# Altium PCB MK76_HOST__B.pcbdoc (part 1 of 2)
Units mil, origin at the board's own origin, x right, y up, seen from the top; angles counter-clockwise.
Board outline 6000 x 6000 mil, 4 copper layers (Top Layer, GND-SIG1, GND-SIG2, Bottom Layer), stack 61.156 mil thick; 71 components, 104 nets, 530 pads, 76 vias.
Unrouted connection lines stored in the file: 214.
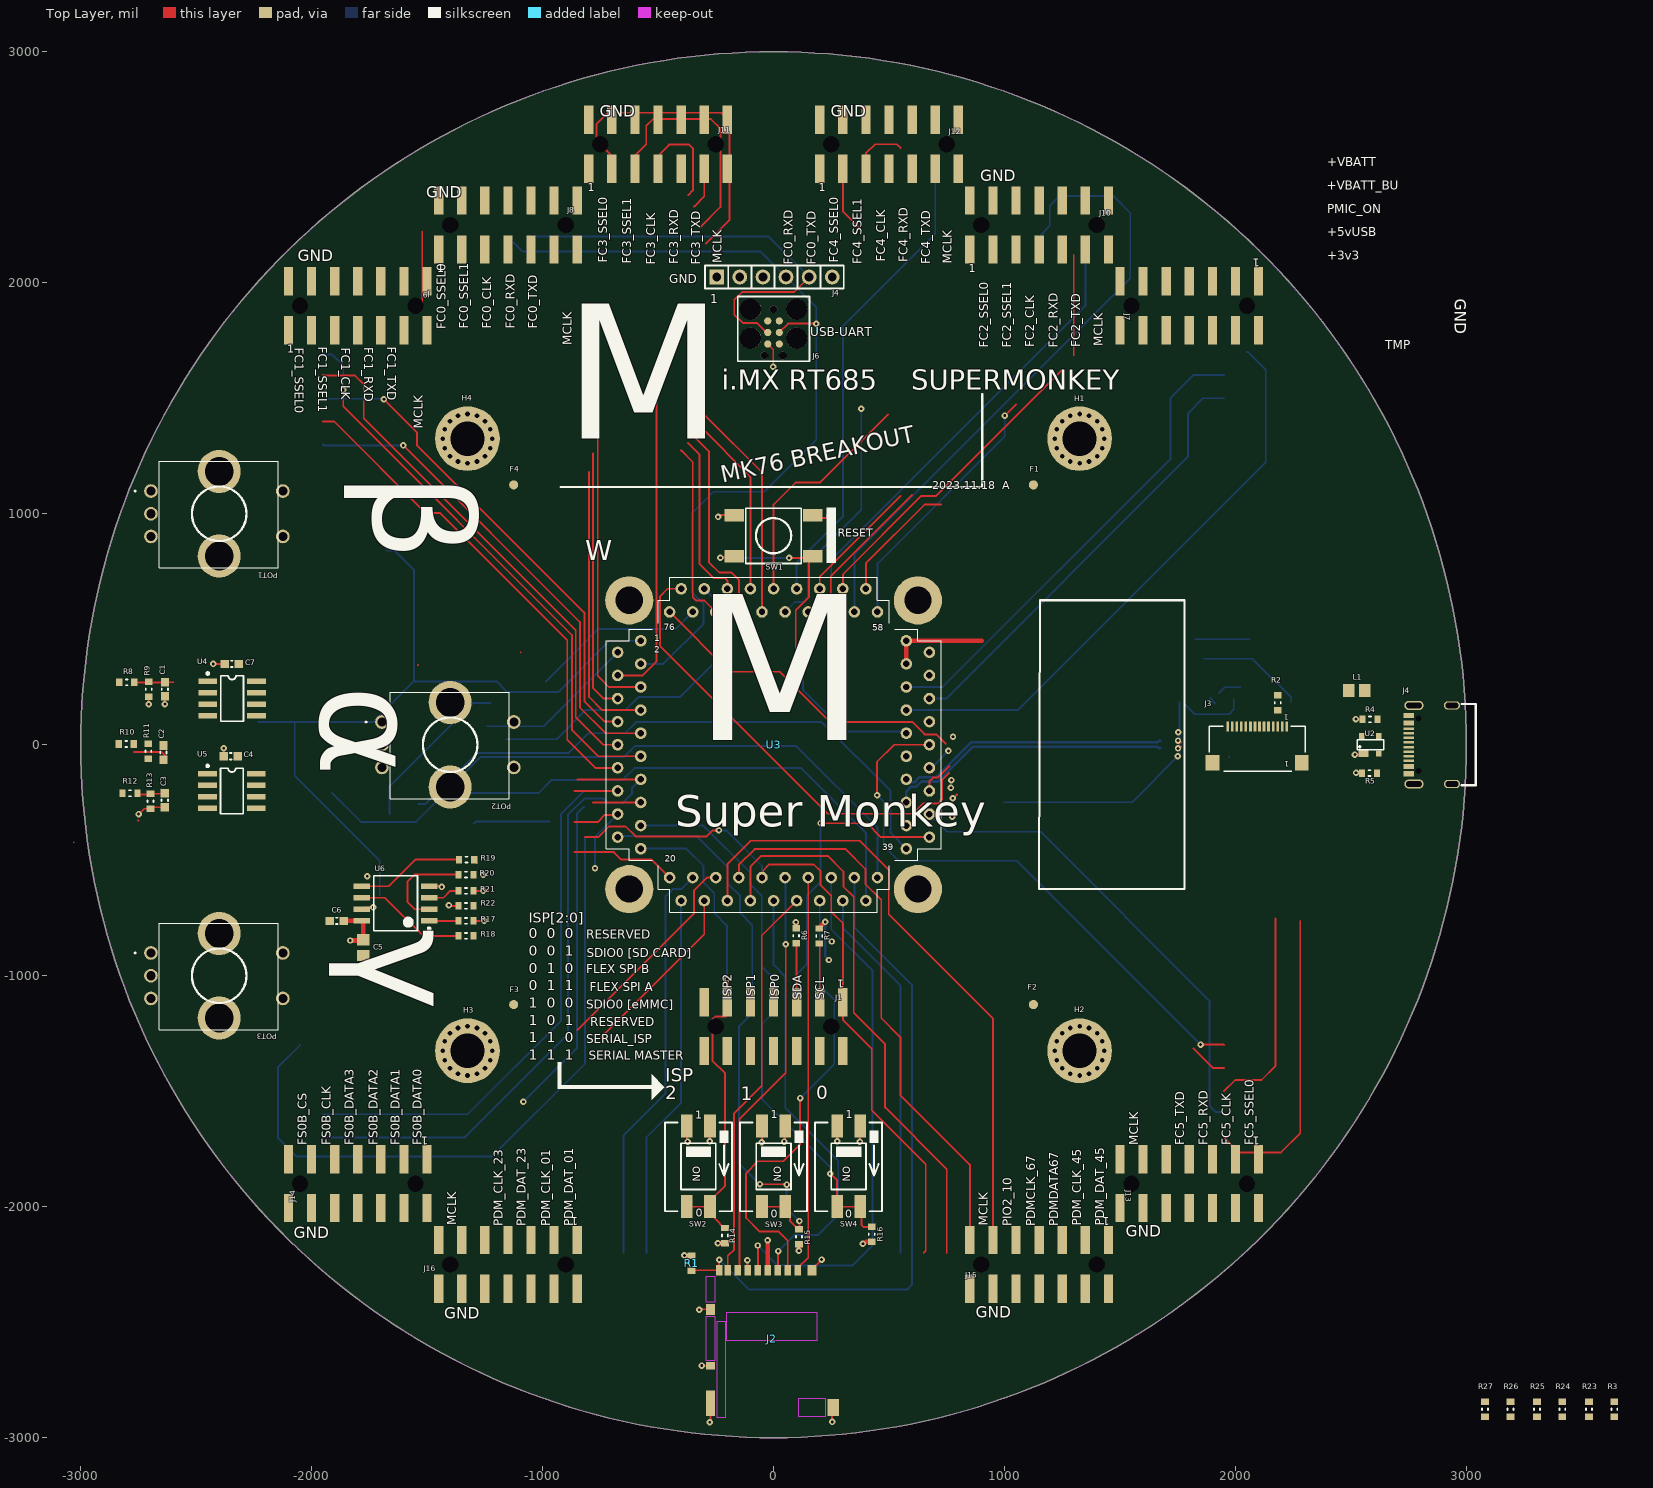
[diagram p0: Top Layer view]
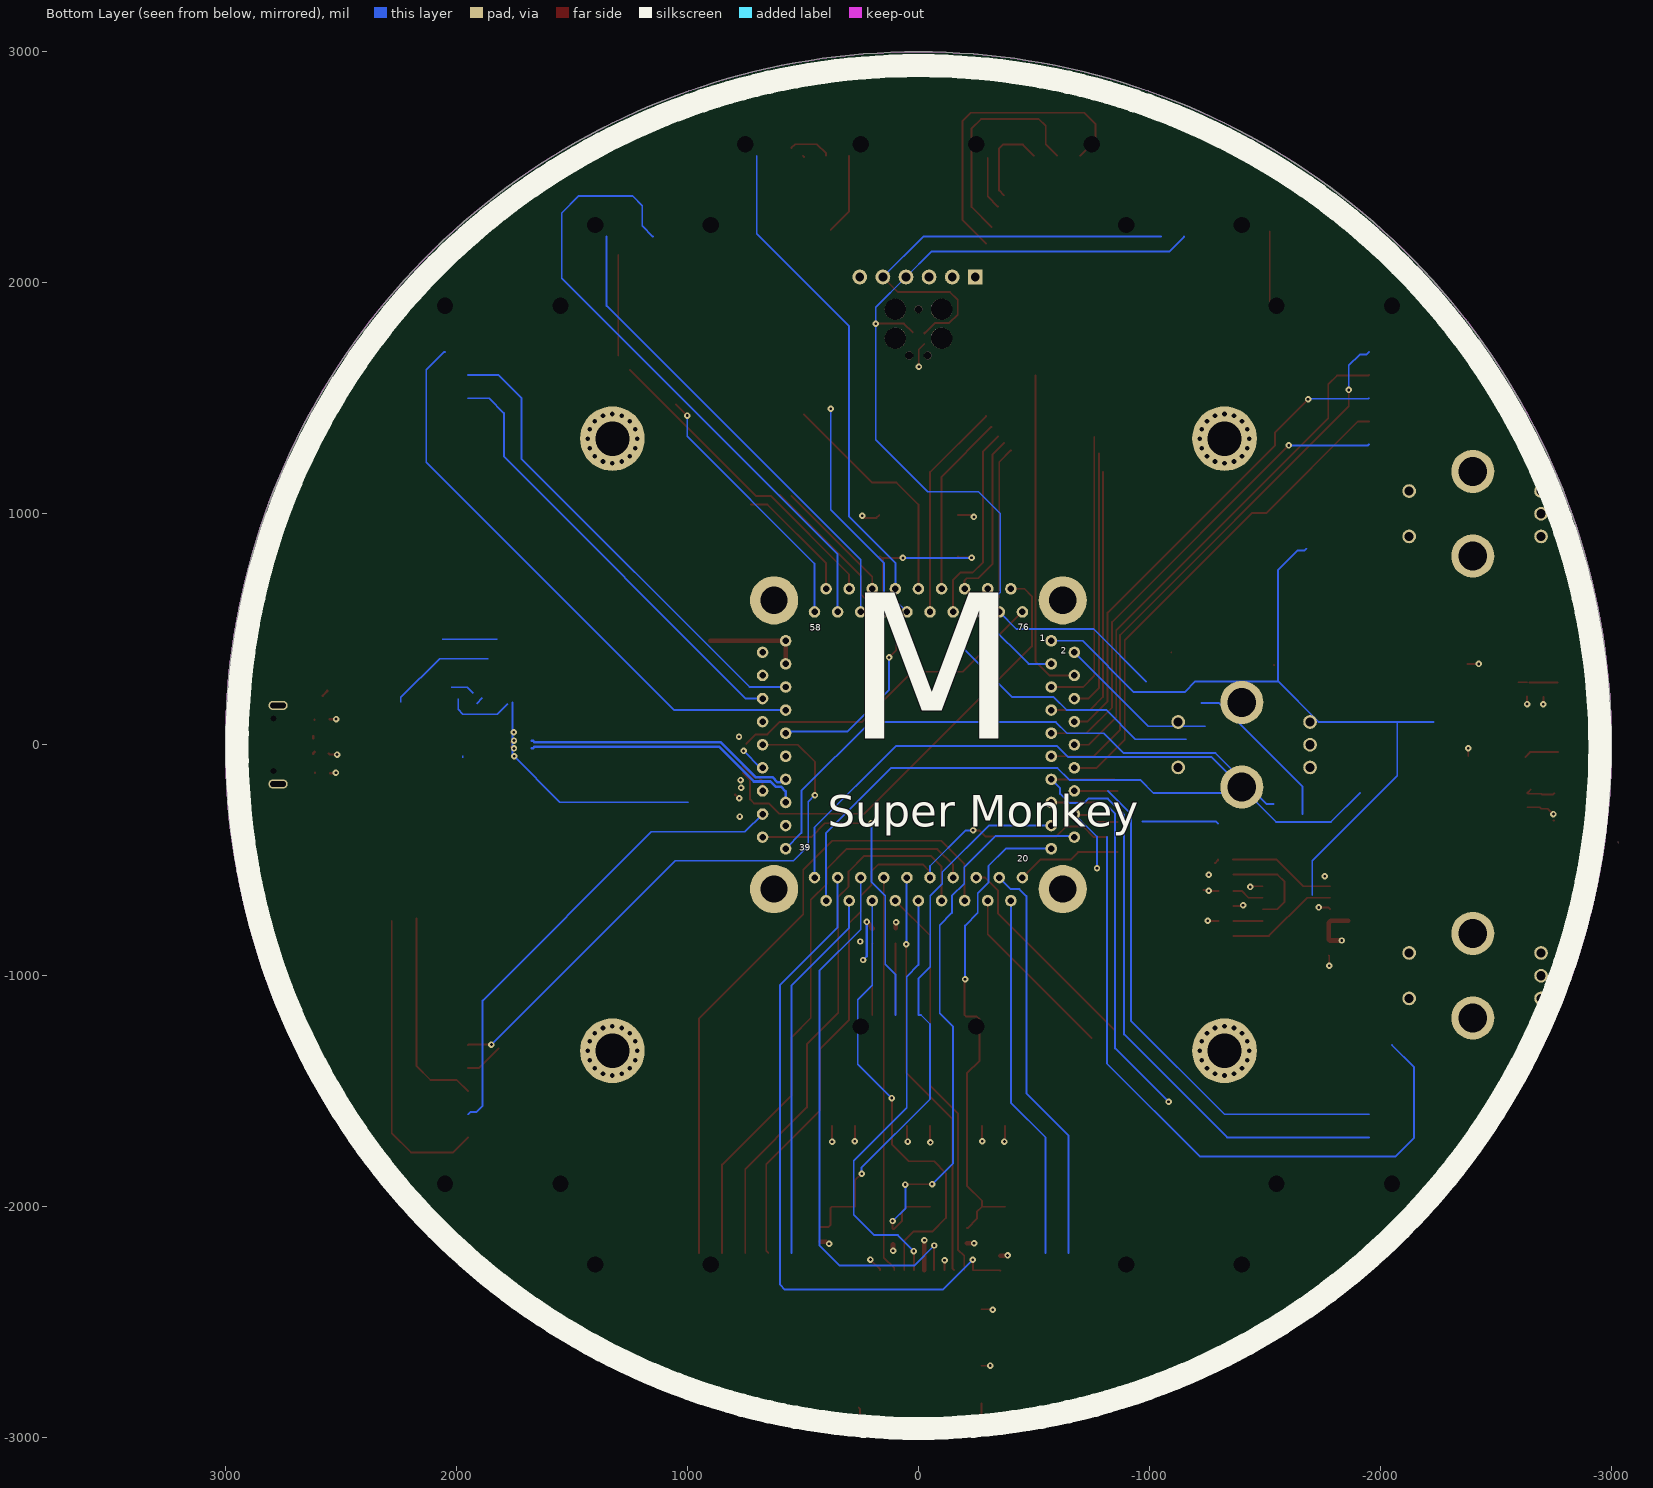
[diagram p1: Bottom Layer view, seen from below]
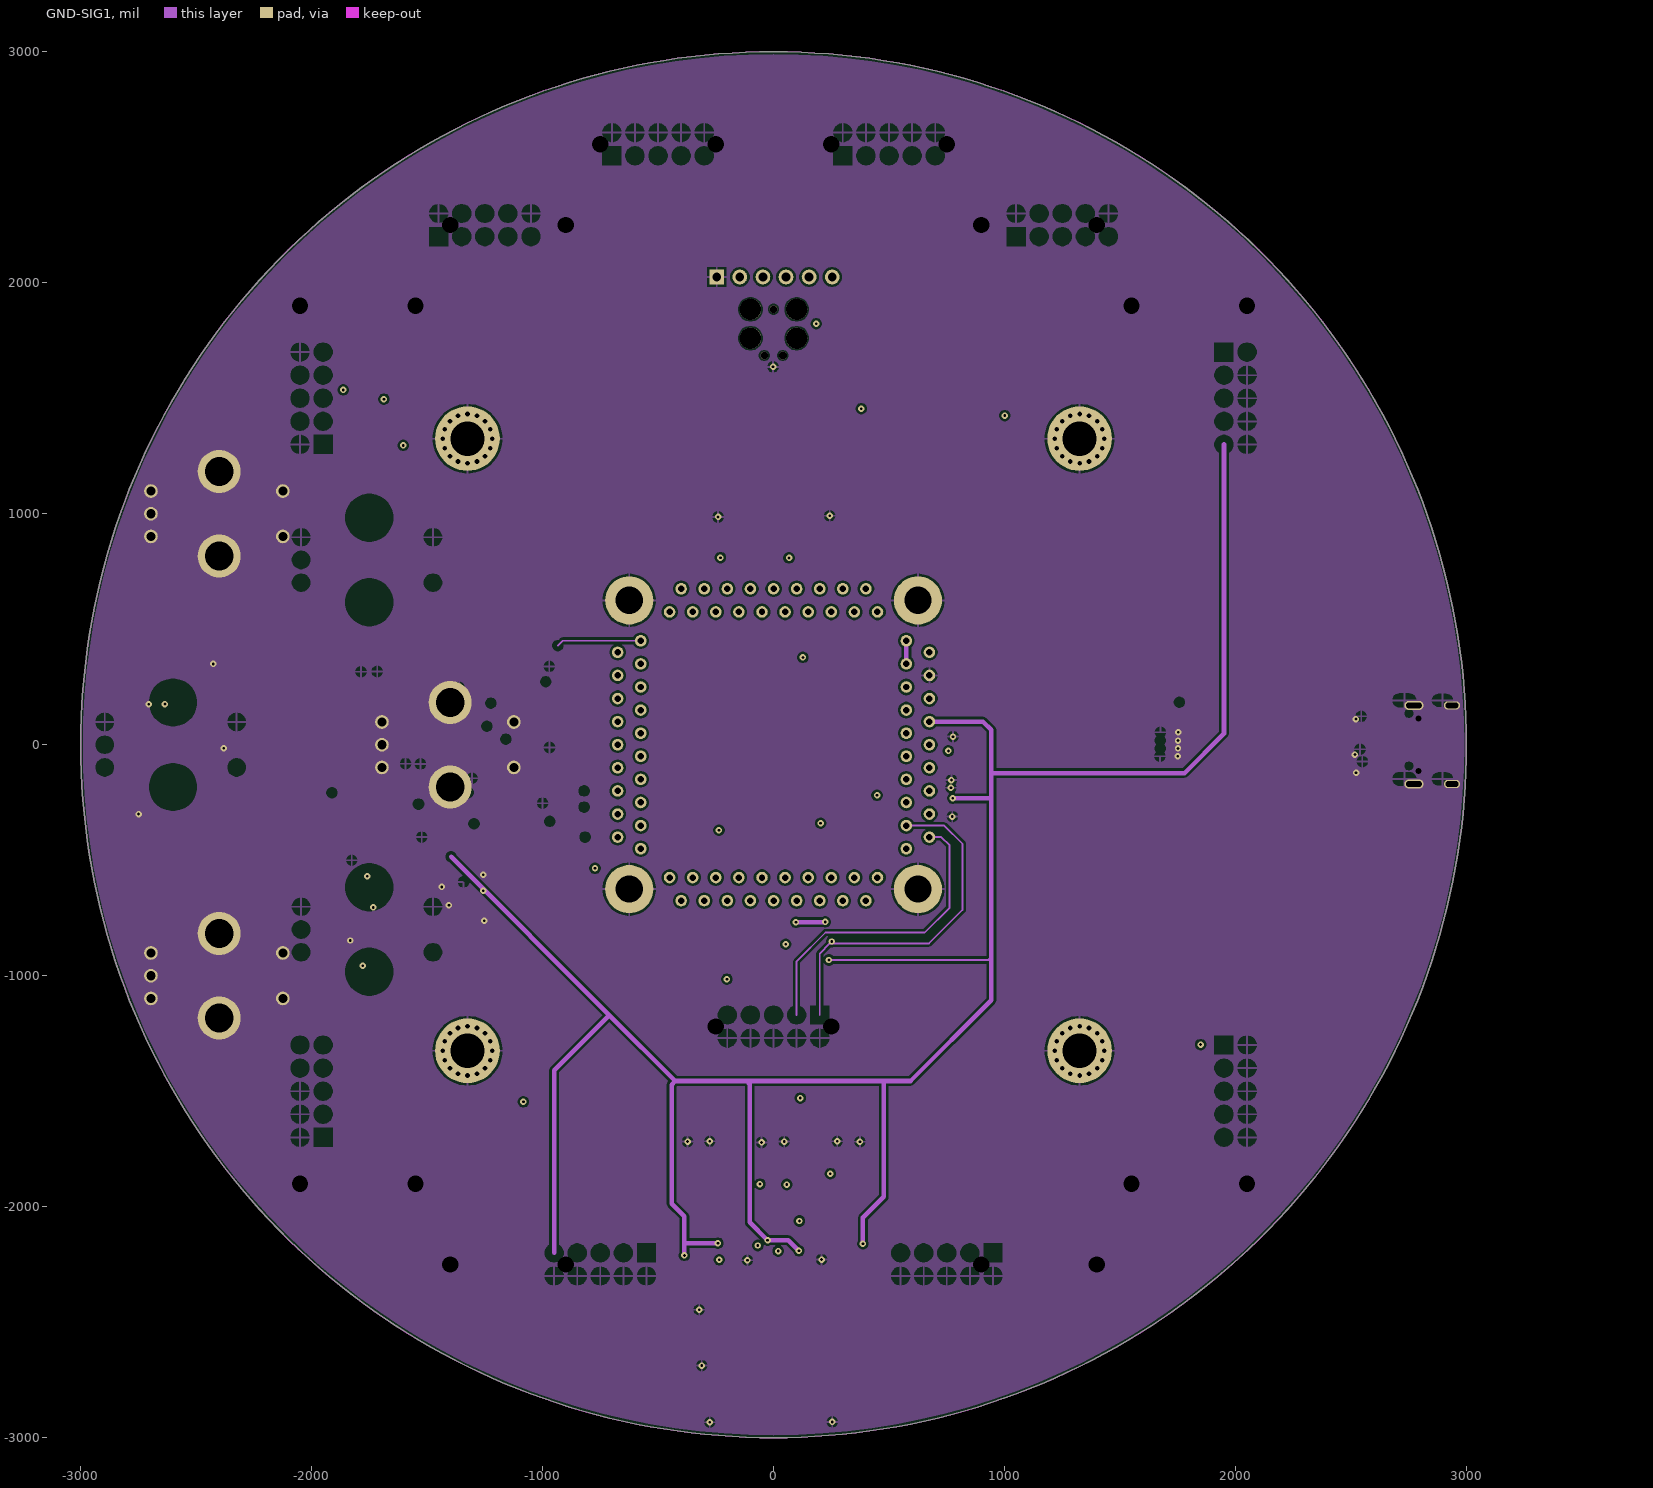
[diagram p2: GND-SIG1]
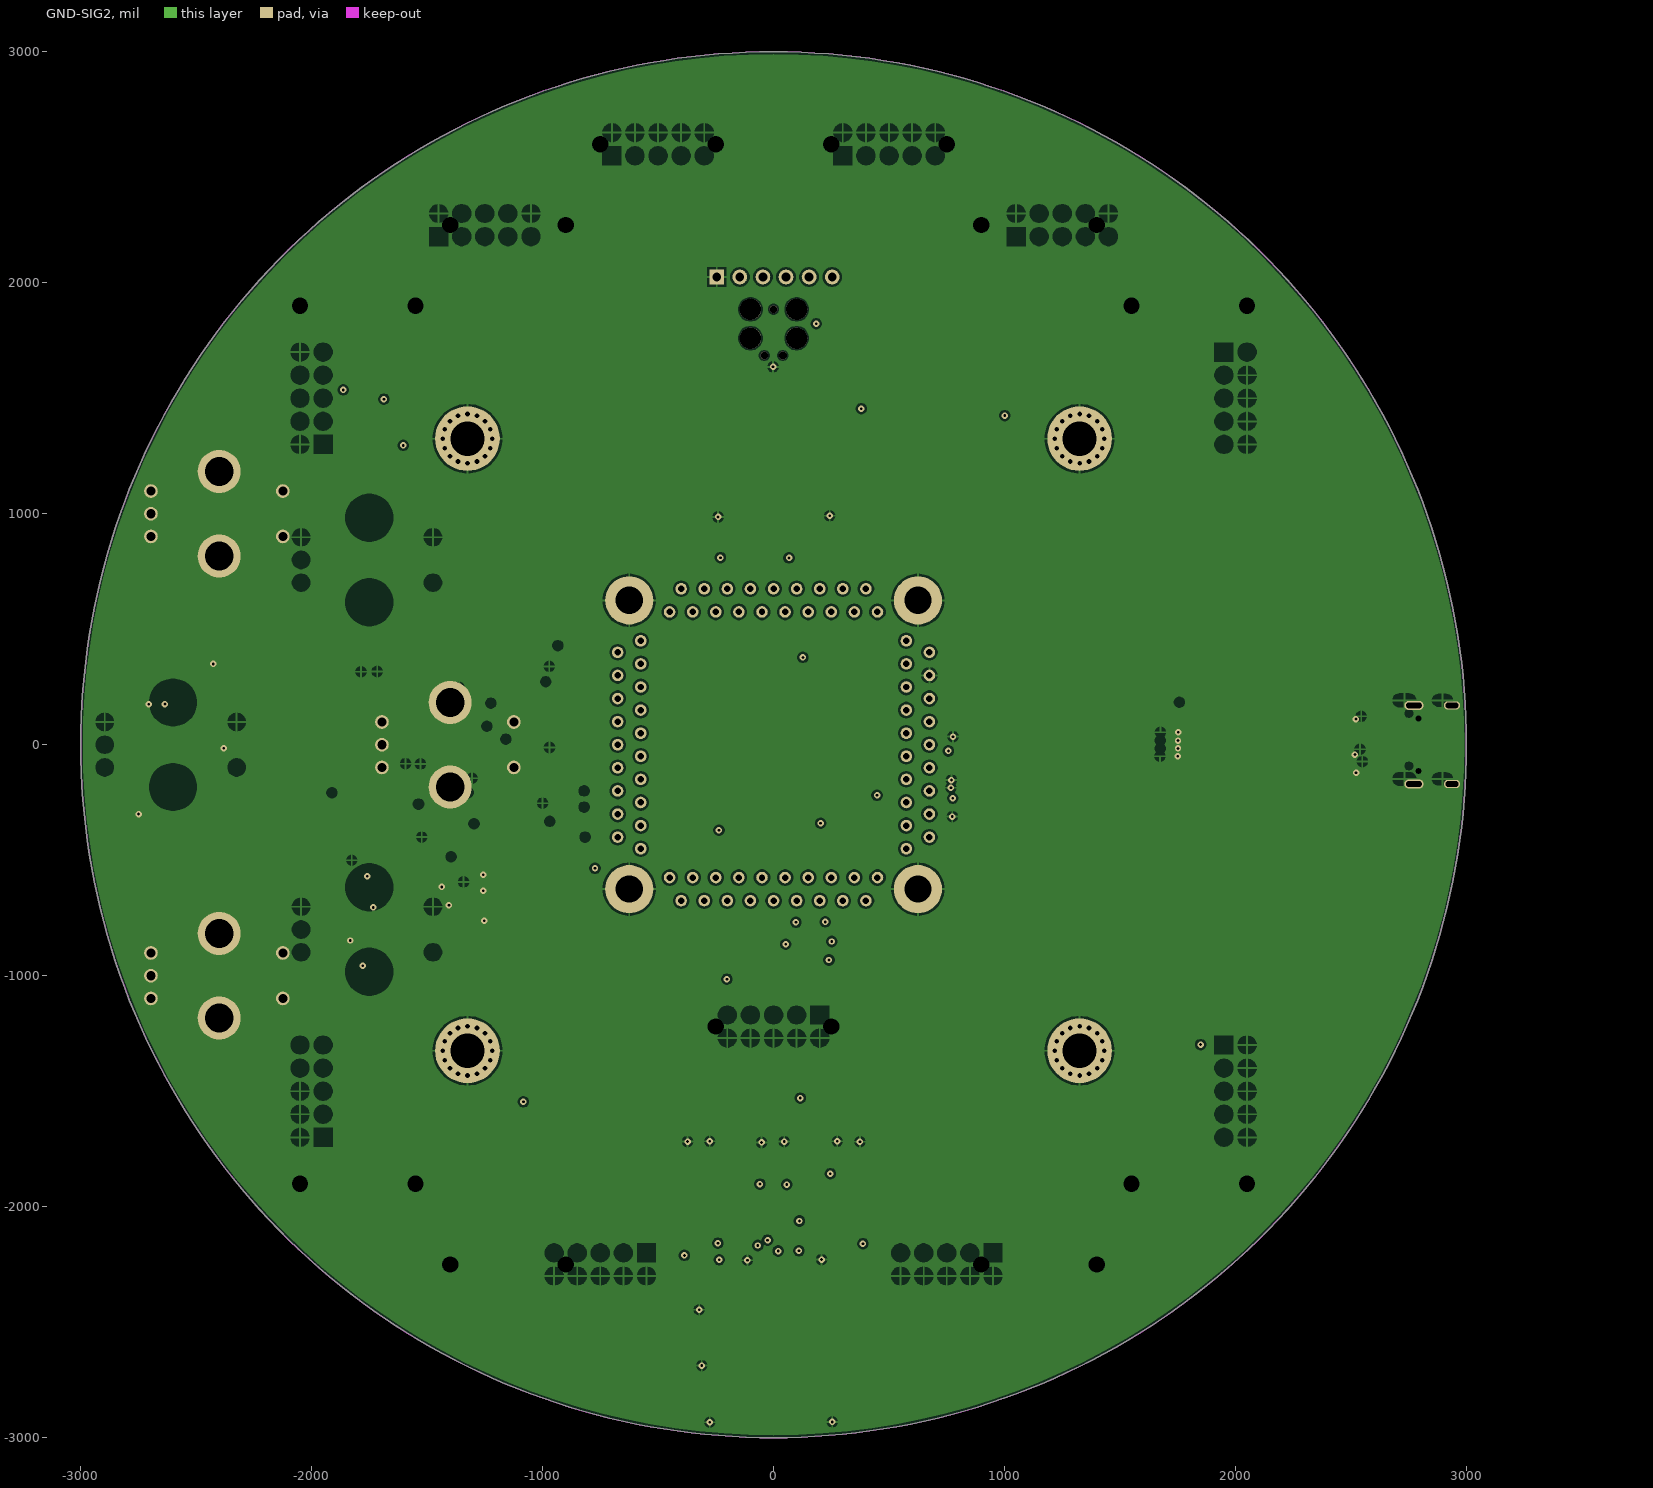
[diagram p3: GND-SIG2]

## Layer stack, top to bottom
Top Solder: solder mask 0.4, Solder Resist, Dk 3.5
Top Layer: signal copper 1.4
Dielectric 2: prepreg 2.8, PP-006, Dk 4.1
GND-SIG1: signal copper 1.378
Dielectric 1: dielectric 50, FR-4, Dk 4.8
GND-SIG2: signal copper 1.378
Dielectric 3: prepreg 2.8, PP-006, Dk 4.1
Bottom Layer: signal copper 1.4
Bottom Solder: solder mask 0.4, Solder Resist, Dk 3.5

## Board outline
-3000,0 ccw(c0,0) 0,-3000 ccw(c0,0) 3000,0 ccw(c0,0) 0,3000 ccw(c0,0)

## Design rules (kind name [scope] priority, off if disabled: settings)
Clearance [All] p1: gap=6 ignorepadtopadclearanceinfootprint=FALSE except(10: Arc-Poly Track-Poly SMDPad-Poly THPad-Poly Via-Poly Fill-Poly Poly-Poly)
DiffPairsRouting [All] p1: maxlimit=10 minlimit=8 mostfreqgap=8 toplayer_minwidth=8 toplayer_maxwidth=11.26 toplayer_prefwidth=11.26 midlayer1_minwidth=8 midlayer1_maxwidth=11.26 midlayer1_prefwidth=11.26 midlayer2_minwidth=8 midlayer2_maxwidth=11.26 midlayer2_prefwidth=11.26 bottomlayer_minwidth=8 bottomlayer_maxwidth=11.26 bottomlayer_prefwidth=11.26 maxuncoupledlength=500
Height [All] p1: minheight=0 maxheight=2000 prefheight=500
HoleSize [All] p1: absolutevalues=TRUE maxlimit=500 minlimit=1 maxpercent=80.000 minpercent=20.000
PolygonConnect [All] p1: connectstyle=Relief reliefconductorwidth=10 reliefentries=4 polygonreliefangle="90 Angle" airgapwidth=10
RoutingVias [All] p1: holewidth=12 width=28 viastyle="Through Hole" minholewidth=12 minwidth=28 maxholewidth=12 maxwidth=28
SolderMaskExpansion [All] p1: expansion=4 istentingtop=FALSE
SupplyNets "Schematic Supply Nets_7" [InNet('+5v0')] p1: voltage=0.000
SupplyNets "Schematic Supply Nets_6" [InNet('GND')] p2: voltage=0.000
SupplyNets "Schematic Supply Nets_5" [InNet('+3v3')] p3: voltage=0.000
SupplyNets "Schematic Supply Nets_4" [InNet('+5vUSB')] p4: voltage=0.000
SupplyNets "Schematic Supply Nets_3" [InNet('+ADC_VREF')] p5: voltage=0.000
SupplyNets "Schematic Supply Nets_2" [InNet('+VBATT_BU')] p6: voltage=0.000
SupplyNets "Schematic Supply Nets_1" [InNet('+VUSB_RAW')] p7: voltage=0.000
SupplyNets "Schematic Supply Nets" [InNet('+VBATT')] p8: voltage=0.000
Width [All] p1: maxlimit=30 minlimit=6 preferedwidth=6
27 further rules are at their usual default settings.

## Classes and differential pairs
differential pair USB: +USB_P -USB_N

## Components (designator, comment, footprint, x,y, rotation, side; value= is the part's Value field where it differs from the comment)
C1 "0.1µF" C0603_0.90MM_MD -2635,240 r90 top
C2 "0.1µF" C0603_0.90MM_MD -2641.76,-33.76 r90 top
C3 "0.1µF" C0603_0.90MM_MD -2636,-240 r90 top
C4 "0.1µF" C0603_0.90MM_MD -2350,-50 r0 top
C5 "4.7µF" C0805_1.45MM_MD -1776.49,-878.07 r90 top
C6 "0.1µF" C0603_0.90MM_MD -1890.97,-762.51 r0 top
C7 "0.1µF" C0603_0.90MM_MD -2345.51,350 r0 top
F1 "PCB Fiducial" "Fiducial 1mm - 2mm" 1125,1125 r180 top
F2 "PCB Fiducial" "Fiducial 1mm - 2mm" 1125,-1125 r180 top
F3 "PCB Fiducial" "Fiducial 1mm - 2mm" -1125,-1125 r180 top
F4 "PCB Fiducial" "Fiducial 1mm - 2mm" -1125,1125 r180 top
H1 "6-32 Hole" "6-32 X 0" 1325,1325 r180 top value=6-32
H2 "6-32 Hole" "6-32 X 0" 1325,-1325 r180 top value=6-32
H3 "6-32 Hole" "6-32 X 0" -1325,-1325 r180 top value=6-32
H4 "6-32 Hole" "6-32 X 0" -1325,1325 r180 top value=6-32
J1 "PZ254-2-07-S" PZ254-2-07-S 0,-1220 r180 top
J2 "DM3AT-SF-PEJM5" DM3AT-SF-PEJM5 -21.06,-2906.89 r0 top
J3 "XF2M-1415-1A" XF2M-1415-1A 2094,0 r180 top
J4 "12402012E212A" 12402012E212A 3039.57,0 r90 top
J4 "TSM-106-01-T-SV" 0901200126 4,2025 r0 top
J6 "TC2030‐CTL‐NL" TC2030 -160,1945 r270 top
J7 "PZ254-2-07-S" PZ254-2-07-S 1800,1900 r180 top
J8 "PZ254-2-07-S" PZ254-2-07-S -1150,2250 r0 top
J9 "PZ254-2-07-S" PZ254-2-07-S -1800,1900 r0 top
J10 "PZ254-2-07-S" PZ254-2-07-S 1150,2250 r0 top
J11 "PZ254-2-07-S" PZ254-2-07-S -500,2600 r0 top
J12 "PZ254-2-07-S" PZ254-2-07-S 500,2600 r0 top
J13 "PZ254-2-07-S" PZ254-2-07-S 1800,-1900 r180 top
J14 "PZ254-2-07-S" PZ254-2-07-S -1800,-1900 r180 top
J15 "PZ254-2-07-S" PZ254-2-07-S 1150,-2250 r180 top
J16 "PZ254-2-07-S" PZ254-2-07-S -1150,-2250 r180 top
L1 "CBC2012T4R7M" C0805_1.45MM_MD 2525,235 r180 top
POT1 "PRS11R-425F-S103B1" PRS11R425FS103B1 -2400,1000 r270 top
POT2 "PRS11R-425F-S103B1" PRS11R425FS103B1 -1400,0 r270 top
POT3 "PRS11R-425F-S103B1" PRS11R425FS103B1 -2400,-1000 r270 top
R1 "100k" R0603_0.55MM_MD -355,-2245 r90 top
R2 "33Ω" R0603_0.55MM_MD 2183,181 r270 top
R3 "100Ω" R0603_0.55MM_MD 3640.15,-2877.18 r90 top
R4 "5.1k" R0603_0.55MM_MD 2582.52,110 r0 top
R5 "5.1k" R0603_0.55MM_MD 2580,-123 r0 top
R6 "2.2k" R0603_0.55MM_MD 98,-827.52 r270 top
R7 "2.2k" R0603_0.55MM_MD 198,-828 r270 top
R8 "0" R0603_0.55MM_MD -2800,270 r0 top
R9 "100k" R0603_0.55MM_MD -2705,240 r90 top
R10 "0" R0603_0.55MM_MD -2801.76,3.24 r0 top
R11 "100k" R0603_0.55MM_MD -2706.76,-28.76 r90 top
R12 "0" R0603_0.55MM_MD -2786,-210 r0 top
R13 "100k" R0603_0.55MM_MD -2697,-245 r90 top
R14 "1k" R0603_0.55MM_MD -210,-2125 r270 top
R15 "1k" R0603_0.55MM_MD 110,-2130 r270 top
R16 "1k" R0603_0.55MM_MD 425,-2120 r270 top
R17 "0" R0603_0.55MM_MD -1331.49,-762.51 r180 top
R18 "0" R0603_0.55MM_MD -1331.49,-827.51 r180 top
R19 "0" R0603_0.55MM_MD -1329,-497.51 r180 top
R20 "0" R0603_0.55MM_MD -1331.49,-562.51 r180 top
R21 "0" R0603_0.55MM_MD -1331.49,-632.51 r180 top
R22 "0" R0603_0.55MM_MD -1331.49,-697.51 r180 top
R23 "100Ω" R0603_0.55MM_MD 3530.15,-2877.18 r90 top
R24 "100Ω" R0603_0.55MM_MD 3415.15,-2877.18 r90 top
R25 "100Ω" R0603_0.55MM_MD 3305.15,-2877.18 r90 top
R26 "100Ω" R0603_0.55MM_MD 3190.15,-2877.18 r90 top
R27 "100Ω" R0603_0.55MM_MD 3080.15,-2877.18 r90 top
SW1 "FSM4JSMATR" FSM4JSMA 0,905 r270 top
SW2 "SWITCH DIP DPST 1POS SMT" "CTS 1-POS DPST" -325,-1825 r180 top value=204-211ST
SW3 "SWITCH DIP DPST 1POS SMT" "CTS 1-POS DPST" 0,-1825 r180 top value=204-211ST
SW4 "SWITCH DIP DPST 1POS SMT" "CTS 1-POS DPST" 325,-1825 r180 top value=204-211ST
U2 "PRTR5V0U2X,215" SOT143B 2554,-37.8 r0 top
U3 "=Value" RT_SUPER_C 0,0 r0 top locked
U4 "MCP6002-I/SN" "SOIC 8" -2344,200 r270 top
U5 "MCP6002-I/SN" "SOIC 8" -2345,-200 r270 top
U6 "W25Q64JVSIM" SOIC127P830X200-8L -1636.49,-687.51 r180 top

## Footprints (in the part's own frame and the unit in brackets; to place one, negate y for a bottom-side part, rotate by r counter-clockwise, add the part's x,y. Pads: shape width x height; smd on the part's side, far side on the other; paste and mask are expansions set on the pad)
"6-32 X 0" [mil] "6-32 X 0 Length Philip Pan Head Machine Screw"
  round 30 hole 20: 1(-107,0) 1(-98.86,-40.95) 1(-98.86,40.95) 1(-75.66,75.66) 1(-75.66,-75.66) 1(-40.95,98.86) 1(-40.95,-98.86) 1(0,107) 1(0,-107) 1(40.95,98.86) 1(40.95,-98.86) 1(75.66,75.66) 1(75.66,-75.66) 1(98.86,-40.95) 1(98.86,40.95) 1(107,0)
  round 280 hole 148: 1(0,0)
12402012E212A [mm] "USB-C  2.0"
  round 0 hole 0.65: 71(2.89,6.28) ALIGN1(-2.89,6.28)
  rect 0.575x1.15 smd: A1B12(-3.2,7.355) A4B9(-2.4,7.355) B1A12(3.2,7.355) B4A9(2.4,7.355)
  rect 0.275x1.15 smd: A5(-1.25,7.355) A6(-0.25,7.355) A7(0.25,7.355) A8(1.25,7.355) B5(1.75,7.355) B6(0.75,7.355) B7(-0.75,7.355) B8(-1.75,7.355)
  oval 1x2.1 hole 0.6 slot 1.7 at 90 deg: M1(-4.32,6.78) M2(4.32,6.78)
  oval 0.9x1.8 hole 0.6 slot 1.4 at 90 deg: M3(-4.32,2.6) M4(4.32,2.6)
  silkscreen extent -4.47,-0.03 4.47,1.52, body extent -4.47,-0.02 4.47,7.58, height 3.27
0901200126 [mil] "CONN HEADER 6POS .100\" STR TIN"
  rect 64x64 hole 38: 1(-250,0)
  round 64 hole 38: 2(-150,0) 3(-50,0) 4(50,0) 5(150,0) 6(250,0)
  silkscreen extent -300,-50 300,50, body extent -305,-50 300,50, height 330
C0603_0.90MM_MD [mm] "Capacitor 0603 - Medium Density"
  rect 0.95x0.9 smd: 1(-0.775,0) 2(0.775,0)
  silkscreen extent -0.1,-0.35 0.1,0.35, body extent -0.8,-0.4 0.8,0.4, height 0.9
C0805_1.45MM_MD [mm] "Capacitor - 0805 - Medium Density"
  rect 1.25x1.4 smd: 1(-0.875,0) 2(0.875,0)
  body extent -1,-0.62 1,0.63, height 1.45
"CTS 1-POS DPST" [mil] "CTS 1-POS DPST"
  rect 50x100 smd: 1(-50,175) 2(-50,-175) 3(50,175) 4(50,-175)
  silkscreen extent -145,-190 145,195, body extent -143,-204 144,206, height 395
DM3AT-SF-PEJM5 [mm] "Hirose DM3AT-SF-PEJM5 uSD connector - Normal Mount"
  rect 0.7x1.2 smd: 1(3.2,16.05) 2(2.1,16.05) 3(1,16.05) 4(-0.1,16.05) 5(-1.2,16.05) 6(-2.3,16.05) 7(-3.4,16.05) 8(-4.5,16.05) CDB(-5.45,16.05)
  rect 1x0.8 smd: CDA(-6.4,5.55)
  rect 1x2.8 smd: M(-6.4,1.4)
  rect 1x1.2 smd: M(-6.4,11.75) M(4.75,16.05)
  rect 1.3x1.9 smd: M(7.1,0.95)
  Top Layer keep-out region: -4.648,8.35 5.325,8.35 5.325,11.4 -4.648,11.4
  Top Layer keep-out region: -5.7,-0.101 -4.7,-0.101 -4.7,10.399 -5.7,10.399
  Top Layer keep-out region: -6.9,6.171 -5.9,6.171 -5.9,10.921 -6.9,10.921
  Top Layer keep-out region: -6.9,12.573 -5.9,12.573 -5.9,15.325 -6.9,15.325
  Top Layer keep-out region: 3.275,0 6.275,0 6.275,1.9 3.275,1.9
  body extent -6.49,0 7.36,16.15, height 1.68
"Fiducial 1mm - 2mm" [mm] "1mm Pad 2mm Opening"
  round 1 smd paste-10 mask+0.5: 1(0,0)
FSM4JSMA [mil] "SWITCH TACTILE SPST-NO 0.05A 12V"
  rect 55x85 smd: A(-89,170) A(-89,-170) B(89,170) B(89,-170)
  silkscreen extent -119,-120 121,120, body extent -118,-198 118,196, height 200
PRS11R425FS103B1 [mm]
  round 1.5 hole 1: 1(-2.5,-7.5) 2(0,-7.5) 3(2.5,-7.5) 4(-2.5,7) 5(2.5,7)
  round 4.74 hole 3.16: MH1(-4.65,0) MH2(4.65,0)
  silkscreen extent -5.75,-9.3 5.95,6.49, body extent -5.75,-6.61 5.95,6.49, height 31.8
PZ254-2-07-S [mm] "2x7 Surface Mount .100\" Header"
  rect 1.02x3.12 smd: 1(-7.62,-2.69) 2(-7.62,2.69) 3(-5.08,-2.69) 4(-5.08,2.69) 5(-2.54,-2.69) 6(-2.54,2.69) 7(0,-2.69) 8(0,2.69) 9(2.54,-2.69) 10(2.54,2.69) 11(5.08,-2.69) 12(5.08,2.69) 13(7.62,-2.69) 14(7.62,2.69)
  round 0 hole 1.8 unplated: M(-6.35,0) M1(6.35,0)
R0603_0.55MM_MD [mm] "Resistor 0603 Medium Density"
  rect 0.7x0.85 smd: 1(-0.825,0) 2(0.825,0)
  silkscreen extent -0.1,-0.33 0.1,0.33, body extent -0.8,-0.4 0.8,0.4, height 0.55
RT_SUPER_C [mil]
  round 50 hole 28: 1(-575,450) 2(-675,400) 3(-575,350) 4(-675,300) 5(-575,250) 6(-675,200) 7(-575,150) 8(-675,100) 9(-575,50) 10(-675,0) 11(-575,-50) 12(-675,-100) 13(-575,-150) 14(-675,-200) 15(-575,-250) 16(-675,-300) 17(-575,-350) 18(-675,-400) 19(-575,-450) 20(-450,-575) 21(-400,-675) 22(-350,-575) 23(-300,-675) 24(-250,-575) 25(-200,-675) 26(-150,-575) 27(-100,-675) 28(-50,-575) 29(0,-675) 30(50,-575) 31(100,-675) 32(150,-575) 33(200,-675) 34(250,-575) 35(300,-675) 36(350,-575) 37(400,-675) 38(450,-575) 39(575,-450) 40(675,-400) 41(575,-350) 42(675,-300) 43(575,-250) 44(675,-200) 45(575,-150) 46(675,-100) 47(575,-50) 48(675,0) 49(575,50) 50(675,100) 51(575,150) 52(675,200) 53(575,250) 54(675,300) 55(575,350) 56(675,400) 57(575,450) 58(450,575) 59(400,675) 60(350,575) 61(300,675) 62(250,575) 63(200,675) 64(150,575) 65(100,675) 66(50,575) 67(0,675) 68(-50,575) 69(-100,675) 70(-150,575) 71(-200,675) 72(-250,575) 73(-300,675) 74(-350,575) 75(-400,675) 76(-450,575)
  round 208.66 hole 118.11: M(-625,-625) M(-625,625) M(625,-625) M(625,625)
  silkscreen extent -725,-725 725,725, body extent -725,-725 725,725, height 466
SOIC127P830X200-8L [mm] "SOIC, 8-Leads, Body 6.1x6.2mm (max), Pitch 1.27mm, IPC High Density"
  rect 1.8x0.6 smd: 1(-3.7,1.905) 2(-3.7,0.635) 3(-3.7,-0.635) 4(-3.7,-1.905) 5(3.7,-1.905) 6(3.7,-0.635) 7(3.7,0.635) 8(3.7,1.905)
  silkscreen extent -3.83,-3.05 2.4,3, body extent -4.2,-2.7 4.2,2.68, height 2.3
"SOIC 8" [mm]
  rect 0.6x2.05 smd: 1(-1.905,-2.675) 2(-0.635,-2.675) 3(0.635,-2.675) 4(1.905,-2.675) 5(1.905,2.675) 6(0.635,2.675) 7(-0.635,2.675) 8(-1.905,2.675)
  silkscreen extent -2.88,-2.8 2.5,1.25, body extent -2.49,-3.19 2.51,3.14, height 1.88
SOT143B [mm] "SOT143B"
  rect 1.1x0.8 smd: 1(0,0)
  rect 0.6x0.7 smd: 2(1.702,0) 3(1.702,1.9) 4(-0.2,1.9)
  silkscreen extent -0.71,0.43 2.21,1.52, body extent -0.7,-0.27 2.22,2.15, height 1
TC2030 [mil] "TC2030-MCP"
  round 31 smd paste-40: 1(110,135) 2(110,185) 3(160,135) 4(160,185) 5(210,135) 6(210,185)
  round 34 hole 35 unplated: A(60,160) B(260,200) C(260,120)
  round 92 hole 93 unplated: D(60,60) E(185,60) F(60,260) G(185,260)
  silkscreen extent 5,5 285,315
XF2M-1415-1A [mm]
  rect 0.3x1.1 smd: 1(-3.249,-2.007) 2(-2.749,-2.007) 3(-2.249,-2.007) 4(-1.749,-2.007) 5(-1.249,-2.007) 6(-0.749,-2.007) 7(-0.249,-2.007) 8(0.251,-2.007) 9(0.751,-2.007) 10(1.251,-2.007) 11(1.751,-2.007) 12(2.251,-2.007) 13(2.751,-2.007) 14(3.251,-2.007)
  rect 1.524x1.702 smd: 22(4.9,2.006) 46(-4.9,2.007)
  silkscreen extent -5.26,-2.01 5.26,2.92, body extent -5.55,-3 5.55,2.9, height 2

## Part data
C1 C2 C3 C4 C6 C7: library part CGA3E2X7R1E104M080AA, "CAP CER 0.1UF 25V X7R 0603", Manufacturer="TDK Corporation", Operating Temperature="-55°C ~ 125°C", Package=0603, Ratings=AEC-Q200, Supplier Part Number 1=445-12541-1-ND, Temperature Coefficient=X7R, Tolerance=±20%, Voltage - Rated=25V, Category=Capacitors, ComponentLink1Description="Datasheet (Internal)", ComponentLink1URL=datasheets\TDK\mlcc_automotive_general_en.pdf, ComponentLink2Description="Datasheet (External)", ComponentLink2URL=https://product.tdk.com/info/en/catalog/datasheets/mlcc_automotive_general_en.pdf, Features=-, Manufacturer Part Number=CGA3E2X7R1E104M080AA, Substitution Notes="0.1µF , 25V , ±20% , X7R , -55°C ~ 125°C , AEC-Q200 , 0603", Supplier 1=Digikey, Thickness (Max)=0.90MM
C5: library part CGA4J3X7R1A475K125AB, "CAP CER 4.7UF 10V X7R 0805", Manufacturer="TDK Corporation", Operating Temperature="-55°C ~ 125°C", Package=0805, Ratings=AEC-Q200, Supplier Part Number 1=445-12730-1-ND, Temperature Coefficient=X7R, Tolerance=±10%, Voltage - Rated=10V, Category=Capacitors, ComponentLink1Description="Datasheet (Internal)", ComponentLink1URL=datasheets\TDK\mlcc_automotive_general_en.pdf, ComponentLink2Description="Datasheet (External)", ComponentLink2URL=https://product.tdk.com/info/en/catalog/datasheets/mlcc_automotive_general_en.pdf, Features=-, Manufacturer Part Number=CGA4J3X7R1A475K125AB, Substitution Notes="4.7µF , 10V , ±10% , X7R , -55°C ~ 125°C , AEC-Q200 , 0805", Supplier 1=Digikey, Thickness (Max)=1.45MM
F1 F2 F3 F4: library part Fiducial
H1 H2 H3 H4: library part 6-32
J1 J7 J8 J9 J10 J11 J12 J13 J14 J15 J16: "250V 3A Standing paste Policy 2.5mm 6mm 14P -40℃~+105℃ 2.54mm Double Row Black 2.54mm 2x7P SMD,P=2.54mm Pin Headers ROHS", JLCPCB Part #=C3294465, Manufacturer=HCTL, Manufacturer Part Number=PZ254-2-07-S
J2: "CONN MICRO SD R/A PUSH-PUSH SMD", Manufacturer="Hirose Electric Co Ltd", Supplier Part Number 1=HR1964CT-ND, Card Type="Secure Digital - microSD™", Category="Connectors, Interconnects", ComponentLink1Description=http://www.hirose.co.jp/cataloge_hp/e60900232.pdf, ComponentLink1URL=http://www.hirose.co.jp/cataloge_hp/e60900232.pdf, Connector Type="Connector and Ejector", Contact Finish=Gold, Contact Finish Thickness=-, Ejector Side=-, Features=Switch, Height Above Board="0.066\" (1.68mm)", Insertion, Removal Method="Push In, Push Out", Manufacturer Part Number=DM3AT-SF-PEJM5, Mounting Feature="Normal, Standard - Top", Mounting Type="Surface Mount, Right Angle", Number of Positions="10 (8 + 2)", Packaging="Cut Tape (CT)", Pricing="1=2.83, 10=2.72, 25=2.4932, 50=2.3798, 100=2.2664, 250=1.98312, 500=1.92648 (USD)", RoHS="RoHS Compliant", Stock=28699, Supplier 1=Digi-Key
J3: "CONN FPC 14POS 0.50MM R/A", JLCPCB Part #=C397114, Manufacturer=Omron, Manufacturer Part Number=XF2M-1415-1A
J4: JLCPCB Part #=C5150972, Manufacturer=Amphenol, Supplier Part Number 1=523-12402012E212A, Category=Connectors, Manufacturer Part Number=12402012E212A, Pricing="1=0.98000, 10=0.77400, 50=0.77400, 100=0.67300, 1000=0.53800, 10000=0.43700 (USD)", RoHS=No, Stock 1=6869, Supplier 1=Mouser
J4: library part "FTDI TTL-232R", "CONN HEADER 6POS .100\" SNGL SMD", Color=Black, Manufacturer="Samtec Inc.", Supplier Part Number 1=SAM8987-ND, Category=Connectors, CategorySort=800, ComponentLink1Description=http://suddendocs.samtec.com/prints/tsm-1xx-xx-xxx-sv-xx-xxx-xx-mkt.pdf, ComponentLink1URL=http://suddendocs.samtec.com/prints/tsm-1xx-xx-xxx-sv-xx-xxx-xx-mkt.pdf, Connector Type="Header, Unshrouded", Contact Finish=Tin, Contact Finish Thickness=-, Contact Mating Length="0.230\" (5.84mm)", Contact Type="Male Pin", Fastening Type=-, Features=-, Manufacturer Part Number=TSM-106-01-T-SV, Mounting Type="Surface Mount", Number of Positions=6, Number of Positions Loaded=All, Number of Rows=1, Packaging=Tube, Part Status=Active, Pitch="0.100\" (2.54mm)", Pricing 1="1=0.69, 10=0.537, 50=0.455, 100=0.4095, 250=0.3458, 500=0.3276, 1000=0.2912, 2500=0.24206, 5000=0.2366 (USD)", RoHS="RoHS Compliant", Row Spacing=-, Stock 1=137, Supplier 1=Digi-Key, Termination=Solder
J6: library part TC2030-FTDI-TTL-232R-3V3, "Tag Connect Pads - No latching Clips - ARM"
L1: "FIXED IND 4.7UH 520MA 650 MOHM", Case Code (Imperial)=0805, Case Code (Metric)=2012, Current Rating=520mA, DC Resistance (DCR)=650mR, Inductance=4.7uH, Inductance Tolerance=20%, Manufacturer="Taiyo Yuden", Max Operating Temperature=105°C, Min Operating Temperature=-40°C, Package Quantity=3000, Saturation Current=360mA, Self Resonant Frequency=45MHz, Supplier Part Number 1=587-1602-1-ND, Test Frequency=7.96MHz, Case/Package=0805, ComponentLink1Description=https://datasheet.ciiva.com/15981/214cbc2012t4r7m-15981637.pdf?src-supplier=Onlinecomponents.com, ComponentLink1URL=https://datasheet.ciiva.com/15981/214cbc2012t4r7m-15981637.pdf?src-supplier=Onlinecomponents.com, ComponentLink2Description=https://datasheet.ciiva.com/1040/cbc2012t4r7m-ss-1040456.pdf?src-supplier=Digi-Key, ComponentLink2URL=https://datasheet.ciiva.com/1040/cbc2012t4r7m-ss-1040456.pdf?src-supplier=Digi-Key, ComponentLink3Description=https://datasheet.ciiva.com/8505/cbc2012t4r7m-ss-8505656.pdf?src-supplier=Avnet, ComponentLink3URL=https://datasheet.ciiva.com/8505/cbc2012t4r7m-ss-8505656.pdf?src-supplier=Avnet, ComponentLink4Description=https://datasheet.ciiva.com/8001/wound02-e-8001849.pdf?src-supplier=Element14, ComponentLink4URL=https://datasheet.ciiva.com/8001/wound02-e-8001849.pdf?src-supplier=Element14, Composition=Wirewound, Core Material=Ferrite, Halogen Free="Halogen Free", Height=1.25mm, Height - Seated (Max)=0.057inch, Lead Free=Exempt, Length=0.079inch, Manufacturer Part Number=CBC2012T4R7M, Max DC Current=520mA, Mount="Surface Mount", Number of Pins=2, Packaging="Tape and Reel", Pricing 1="1=0.24000, 10=0.21600, 100=0.14860, 500=0.12702, 1000=0.09729 (USD)", REACH SVHC="No SVHC", RoHS=Yes, Shielding=Unshielded, Stock 1=7720, Supplier 1=Digi-Key, Termination=SMD/SMT, Tolerance=20%, Width=0.049inch
POT1 POT2 POT3: "10k Pot w/ Momentary Switch - 25mm Length", Manufacturer=Bourns, Supplier Part Number 1=652-PRS11R425FS103B1, Manufacturer Part Number=PRS11R-425F-S103B1, Pricing="1=3.76000, 10=3.30000, 50=3.30000, 100=2.70000, 1000=1.82000, 10000=1.70000 (USD)", RoHS=No, Stock 1=729, Supplier 1=Mouser
R1 R9 R11 R13: library part ERJ-3EKF1003V, "RES 100K OHM 1/10W 1% 0603 SMD", Limiting Element Voltage=75, Manufacturer="Panasonic Electronic Components", Maximum Overload Voltage=150, Maximum Working Voltage=75.0V, Package="0603 (1608 Metric)", Package Power="0603  (0.1W)", Power (Watts)="0.1W- 1/10W", Ratings=AEC-Q200, Sort Value=100000, Sort Value Package=603_100000, Supplier Package=0603, Supplier Part Number 1=P100KHCT-ND, Temperature Coefficient=±100ppm/°C, Tolerance=±1%, Category=Resistors, ComponentLink1Description="Internal Datasheet", ComponentLink1URL="datasheets\Panasonic Electronic Components\AOA0000CE2.pdf", ComponentLink2Description="External Datasheet", ComponentLink2URL=http://industrial.panasonic.com/www-data/pdf/AOA0000/AOA0000CE2.pdf, Composition="Thick Film", Features=-, Height=0.55MM, Manufacturer Part Number=ERJ-3EKF1003V, Number of Terminations=2, Packaging="Cut Tape (CT)", Resistance (Ohms)=100k, Size / Dimension="0.063\" L x 0.031\" W (1.60mm x 0.80mm)", Substitution Notes="100k , ±1% , 0603 , AEC-Q200", Supplier 1=Digi-Key
R2: library part ERJ-3EKF33R0V, "RES 33 OHM 1/10W 1% 0603 SMD", JLCPCB Part #=C441971, Limiting Element Voltage=75, Manufacturer="Panasonic Electronic Components", Maximum Overload Voltage=150, Maximum Working Voltage=1.8V, Package="0603 (1608 Metric)", Package Power="0603  (0.1W)", Power (Watts)="0.1W- 1/10W", Ratings=AEC-Q200, Resistance (Ohms)=33, Sort Value Package=603_33, Supplier Package=0603, Temperature Coefficient=±100ppm/°C, Tolerance=±1%, Category=Resistors, Composition="Thick Film", Features=-, Height=0.55MM, Manufacturer 1="Panasonic Electronic Components", Manufacturer Part Number=ERJ-3EKF33R0V, Manufacturer Part Number 1=ERJ-3EKF33R0V, Number of Terminations=2, Packaging="Cut Tape (CT)", Size / Dimension="0.063\" L x 0.031\" W (1.60mm x 0.80mm)", Sort Value=33, Substitution Notes="33 , ±1% , 0603 , AEC-Q200"
R3 R23 R24 R25 R26 R27: library part ERJ-3EKF1000V, "RES 100 OHM 1/10W 1% 0603 SMD", JLCPCB Part #=C193336, Limiting Element Voltage=75, Manufacturer="Panasonic Electronic Components", Maximum Overload Voltage=150, Maximum Working Voltage=3.2V, Package="0603 (1608 Metric)", Package Power="0603  (0.1W)", Power (Watts)="0.1W- 1/10W", Ratings=AEC-Q200, Resistance (Ohms)=100, Sort Value Package=603_100, Supplier Package=0603, Temperature Coefficient=±100ppm/°C, Tolerance=±1%, Category=Resistors, Composition="Thick Film", Features=-, Height=0.55MM, Manufacter Part Number=ERJ-3EKF1000V, Manufacturer 1="Panasonic Electronic Components", Manufacturer Part Number 1=ERJ-3EKF1000V, Number of Terminations=2, Packaging="Cut Tape (CT)", Size / Dimension="0.063\" L x 0.031\" W (1.60mm x 0.80mm)", Sort Value=100, Substitution Notes="100 , ±1% , 0603 , AEC-Q200"
R4 R5: library part ERJ-3EKF5101V, "RES 5.1K OHM 1/10W 1% 0603 SMD", Limiting Element Voltage=75, Manufacturer="Panasonic Electronic Components", Maximum Overload Voltage=150, Maximum Working Voltage=22.6V, Package="0603 (1608 Metric)", Package Power="0603  (0.1W)", Power (Watts)="0.1W- 1/10W", Ratings=AEC-Q200, Sort Value=5100, Sort Value Package=603_5100, Supplier Package=0603, Supplier Part Number 1=P5.10KHCT-ND, Temperature Coefficient=±100ppm/°C, Tolerance=±1%, Category=Resistors, ComponentLink1Description="Internal Datasheet", ComponentLink1URL="datasheets\Panasonic Electronic Components\AOA0000CE2.pdf", ComponentLink2Description="External Datasheet", ComponentLink2URL=http://industrial.panasonic.com/www-data/pdf/AOA0000/AOA0000CE2.pdf, Composition="Thick Film", Features=-, Height=0.55MM, Manufacturer Part Number=ERJ-3EKF5101V, Number of Terminations=2, Packaging="Cut Tape (CT)", Resistance (Ohms)=5.1k, Size / Dimension="0.063\" L x 0.031\" W (1.60mm x 0.80mm)", Substitution Notes="5.1k , ±1% , 0603 , AEC-Q200", Supplier 1=Digi-Key
R6 R7: library part ERJ-3EKF2201V, "RES 2.2K OHM 1/10W 1% 0603 SMD", Limiting Element Voltage=75, Manufacturer="Panasonic Electronic Components", Maximum Overload Voltage=150, Maximum Working Voltage=14.8V, Package="0603 (1608 Metric)", Package Power="0603  (0.1W)", Power (Watts)="0.1W- 1/10W", Ratings=AEC-Q200, Sort Value=2200, Sort Value Package=603_2200, Supplier Package=0603, Supplier Part Number 1=P2.20KHCT-ND, Temperature Coefficient=±100ppm/°C, Tolerance=±1%, Category=Resistors, ComponentLink1Description="Internal Datasheet", ComponentLink1URL="datasheets\Panasonic Electronic Components\AOA0000CE2.pdf", ComponentLink2Description="External Datasheet", ComponentLink2URL=http://industrial.panasonic.com/www-data/pdf/AOA0000/AOA0000CE2.pdf, Composition="Thick Film", Features=-, Height=0.55MM, Manufacturer Part Number=ERJ-3EKF2201V, Number of Terminations=2, Packaging="Cut Tape (CT)", Resistance (Ohms)=2.2k, Size / Dimension="0.063\" L x 0.031\" W (1.60mm x 0.80mm)", Substitution Notes="2.2k , ±1% , 0603 , AEC-Q200", Supplier 1=Digi-Key
R8 R10 R12 R17 R18 R19 R20 R21 R22: library part ERJ-3GEY0R00V, "RES 0.0 OHM 1/10W JUMP 0603 SMD", Limiting Element Voltage=75, Manufacturer="Panasonic Electronic Components", Maximum Overload Voltage=150, Maximum Working Voltage=0.0V, Package="0603 (1608 Metric)", Package Power="0603  (0.1W)", Power (Watts)="0.1W- 1/10W", Ratings=AEC-Q200, Sort Value Package=603_0, Supplier Package=0603, Supplier Part Number 1=P0.0GCT-ND, Temperature Coefficient=-, Tolerance=Jumper, Category=Resistors, ComponentLink1Description="Internal Datasheet", ComponentLink1URL="datasheets\Panasonic Electronic Components\AOA0000CE1.pdf", ComponentLink2Description="External Datasheet", ComponentLink2URL=http://industrial.panasonic.com/www-data/pdf/AOA0000/AOA0000CE1.pdf, Composition="Thick Film", Features=-, Height=0.55MM, Manufacturer Part Number=ERJ-3GEY0R00V, Number of Terminations=2, Resistance (Ohms)=0, Size / Dimension="0.063\" L x 0.031\" W (1.60mm x 0.80mm)", Sort Value=0, Substitution Notes="0 , Jumper , 0603 , AEC-Q200", Supplier 1=Digi-Key
R14 R15 R16: library part ERJ-3EKF1001V, "RES 1K OHM 1/10W 1% 0603 SMD", Limiting Element Voltage=75, Manufacturer="Panasonic Electronic Components", Maximum Overload Voltage=150, Maximum Working Voltage=10.0V, Package="0603 (1608 Metric)", Package Power="0603  (0.1W)", Power (Watts)="0.1W- 1/10W", Ratings=AEC-Q200, Sort Value=1000, Sort Value Package=603_1000, Supplier Package=0603, Supplier Part Number 1=P1.00KHCT-ND, Temperature Coefficient=±100ppm/°C, Tolerance=±1%, Category=Resistors, ComponentLink1Description="Internal Datasheet", ComponentLink1URL="datasheets\Panasonic Electronic Components\AOA0000CE2.pdf", ComponentLink2Description="External Datasheet", ComponentLink2URL=http://industrial.panasonic.com/www-data/pdf/AOA0000/AOA0000CE2.pdf, Composition="Thick Film", Features=-, Height=0.55MM, Manufacturer Part Number=ERJ-3EKF1001V, Number of Terminations=2, Packaging="Cut Tape (CT)", Resistance (Ohms)=1k, Size / Dimension="0.063\" L x 0.031\" W (1.60mm x 0.80mm)", Substitution Notes="1k , ±1% , 0603 , AEC-Q200", Supplier 1=Digi-Key
SW1: "SWITCH TACTILE SPST-NO 0.05A 12V", Contact Rating @ Voltage="0.05A @ 12VDC", Manufacturer="TE Connectivity", Operating Force=160gf, Supplier Part Number 1=450-1759-1-ND, Actuator Orientation="Top Actuated", Actuator Type=Standard, Category=Switches, Circuit=SPST-NO, ComponentLink1Description=http://documents.tycoelectronics.com/commerce/DocumentDelivery/DDEController?Action=srchrtrv&DocNm=2-1437565-7&DocType=CD&DocLang=EN, ComponentLink1URL=http://documents.tycoelectronics.com/commerce/DocumentDelivery/DDEController?Action=srchrtrv&DocNm=2-1437565-7&DocType=CD&DocLang=EN, Illumination=Non-Illuminated, Manufacturer Part Number=FSM4JSMATR, Mounting Type="Surface Mount", Outline="6.00mm x 6.00mm", Packaging="Cut Tape (CT)", Pricing 1="1=0.36, 10=0.34, 25=0.2912, 50=0.2474, 100=0.2377, 250=0.21344, 500=0.20374 (USD)", RoHS="RoHS Compliant", Stock 1=35617, Supplier 1=Digi-Key, Switch Function=Off-Mom, Termination Style="Gull Wing"
SW2 SW3 SW4: library part 204-211ST, Contact Rating @ Voltage="0.1A @ 50VDC", Manufacturer="CTS Corporation Resistor/Electrocomponents", Supplier Part Number 1=CT204211ST-ND, Actuator Level=Raised, Actuator Type=Standard, Category=Switches, Circuit=DPST, ComponentLink1Description=http://www.ctscorp.com/components/Datasheets/204.pdf, ComponentLink1URL=http://www.ctscorp.com/components/Datasheets/204.pdf, Manufacturer Part Number=204-211ST, Mounting Type="Surface Mount", Number of Positions=1, Orientation="Top Actuated", Pricing 1="1=1.42, 10=1.134, 100=1.0024, 500=0.95486 (USD)", RoHS="RoHS Compliant", Stock 1=8750, Supplier 1=Digi-Key, Washable=Yes
U2: "TVS DIODE 5.5VWM SOT143B", Capacitance @ Frequency="1pF @ 1MHz", Current - Peak Pulse (10/1000µs)=-, Manufacturer="NXP Semiconductors", Operating Temperature="-40°C ~ 85°C (TA)", Package / Case="TO-253-4, TO-253AA", Power Line Protection=Yes, Supplier Device Package=SOT-143B, Supplier Part Number 1=568-4140-1-ND, Voltage - Breakdown (Min)=6V, Voltage - Reverse Standoff (Typ)="5.5V (Max)", Applications="General Purpose", Bidirectional Channels=2, Category="Circuit Protection", ComponentLink1Description=http://www.nxp.com/documents/data_sheet/PRTR5V0U2X.pdf, ComponentLink1URL=http://www.nxp.com/documents/data_sheet/PRTR5V0U2X.pdf, Manufacturer Part Number=PRTR5V0U2X,215, Mounting Type="Surface Mount", Packaging="Cut Tape (CT)", Power - Peak Pulse=-, Pricing="1=0.57, 10=0.477, 25=0.418, 100=0.3578, 250=0.31036, 500=0.26286, 1000=0.20265 (USD)", RoHS="RoHS Compliant", Stock=11734, Supplier 1=Digi-Key, Type="Steering (Rail to Rail)", Unidirectional Channels=-, Voltage - Clamping (Max) @ Ipp=-
U3: library part RT_SUPER_C, "Super Monkey Rev C"
U4 U5: "IC OPAMP 1.8V 1MHZ DUAL 8-SOIC", Current - Input Bias=1pA, Current - Output / Channel=23mA, Current - Supply=100µA, Manufacturer="Microchip Technology", Operating Temperature="-40°C ~ 85°C", Package / Case="8-SOIC (0.154\", 3.90mm Width)", Supplier Device Package="8-SOIC N", Supplier Part Number 1=MCP6002-I/SN-ND, Voltage - Input Offset=4.5mV, Voltage - Supply, Single/Dual (±)="1.8 V ~ 6 V", -3db Bandwidth=-, Amplifier Type="General Purpose", Category="Integrated Circuits (ICs)", ComponentLink1Description=http://ww1.microchip.com/downloads/en/DeviceDoc/21733j.pdf, ComponentLink1URL=http://ww1.microchip.com/downloads/en/DeviceDoc/21733j.pdf, Gain Bandwidth Product=1MHz, Manufacturer Part Number=MCP6002-I/SN, Mounting Type="Surface Mount", Number of Circuits=2, Output Type=Rail-to-Rail, Packaging=Tube, Pricing 1="1=0.4, 10=0.33, 25=0.28, 100=0.25 (USD)", RoHS="RoHS Compliant", Slew Rate="0.6 V/µs", Stock 1=45024, Supplier 1=Digi-Key
U6: library part W25Q128JVSIM, "NOR Flash Serial (SPI, Dual SPI, Quad SPI) 3V/3.3V 128M-bit 16M x 8 6ns 8-Pin SOIC Tube", Case/Package=SOIC, Frequency=104MHz, Manufacturer=Winbond, Manufacturer Part Number=W25Q64JVSSIQ, Max Operating Temperature=85°C, Max Supply Voltage=3.6V, Min Operating Temperature=-40°C, Min Supply Voltage=2.7V, Operating Supply Voltage=3V, Supplier Part Number 1=W25Q128JVSIM-ND, Access Time=6ns, Address Bus Width=24b, Category=Flash, ComponentLink1Description=http://www.winbond.com/resource-files/w25q64jv%20spi%20revg%2012142016.pdf, ComponentLink1URL=http://www.winbond.com/resource-files/w25q64jv%20spi%20revg%2012142016.pdf, ComponentLink2Description=https://www.winbond.com/resource-files/w25q64jv%20spi%20%20%20revc%2006032016%20kms.pdf, ComponentLink2URL=https://www.winbond.com/resource-files/w25q64jv%20spi%20%20%20revc%2006032016%20kms.pdf, ComponentLink3Description=http://www.winbond.com/resource-files/w25q128jv_dtr%20revc%2003272018%20plus.pdf?src-supplier=Digi-Key, ComponentLink3URL=http://www.winbond.com/resource-files/w25q128jv_dtr%20revc%2003272018%20plus.pdf?src-supplier=Digi-Key, Density=64MB, Interface=SPI,Serial, Memory Size=128Mb, Memory Type=NOR,FLASH, Mount="Surface Mount", Packaging=Tray, Page Size=256B, Pricing 1="1=1.88000, 10=1.71400, 25=1.66760, 50=1.65880, 100=1.48280, 250=1.47852, 500=1.45618, 1000=1.39437, 5000=1.29820 (USD)", RoHS=Yes, RoHS Compliant=Yes, Stock 1=27539, Supplier 1=Digi-Key

## Via types
v1: diameter 28, hole 12, Top Layer to Bottom Layer, tented both sides, 76 vias

## Nets (pads, with @x,y where several pads share a name; then routed paths per layer and width w, separated by ;. In a path a pad name is that pad's centre, name@x,y a point inside that pad or via, vN(x,y) a via of type N, cw(c..) or ccw(c..) an arc to the next point about the centre after c; other vN are vias at no path point)
+3v3: C5.2 C6.2 J2.4 J3.10 J3.11 J7.9 J15.11 J16.11 R1.2 R6.1 R7.1 R14.2 R15.2 R16.2 U3.50 U6.8 | length 12082.6
  Top Layer w10: v1@777.73,-232 792.99,-216.74
  Top Layer w20: C6.2 -1785.3,-762.51 -1776.49,-771.33 C5.2 -1780.38,-847.51 v1(-1832.49,-847.51) ; v1(-386,-2211) -384.48,-2212.52 R1.2 ; v1(-241,-2158) -238,-2158 -237.48,-2157.48 R14.2 ; v1(-26,-2145) -25,-2146 J2.4 ; v1(97,-769) 97.5,-769.5 97.5,-794.54 R6.1 ; v1(110,-2191) R15.2 ; R7.1 200.95,-795.52 204.73,-791.74 204.73,-786.27 v1(224,-767) ; 400.47,-2152.48 R16.2 ; v1(775.73,-232) v1@777.73,-232
  GND-SIG1 w10: v1(240,-932) 930,-932 943,-919
  GND-SIG1 w20: -1396,-485 -710.5,-1170.5 ; -950,-2200 -950,-1410 -710.5,-1170.5 ; v1(-386,-2211) -386,-2152 ; v1(-241,-2158) -380,-2158 -386,-2152 ; v1(97,-769) 98,-768 223,-768 v1(224,-767) ; v1(110,-2191) 64,-2145 v1(-26,-2145) -103,-2068 -103,-1470 -117,-1456 ; v1(387,-2160) 387,-2047 477,-1957 477,-1456 ; U3.50 907,100 943,64 943,-123 ; v1(775.73,-232) 943,-232 ; 1950,1300 1950,48 1779,-123 943,-123 ; -710.5,-1170.5 -425,-1456 ; -425,-1456 -117,-1456 ; -425,-1456 -441,-1472 -441,-1987 -386,-2042 -386,-2152 ; -117,-1456 477,-1456 ; 477,-1456 593,-1456 943,-1106 943,-919 943,-232 ; 943,-232 943,-123
  Bottom Layer w10: v1(224,-767) 224,-916 v1(240,-932)
+5v0: J3.4
+5vUSB: J7.7 L1.2 U2.4 U3.55 U3.57 | length 1600.7
  Top Layer w10: U3.55 U3.55@577,352
  Top Layer w20: U3.55 U3.57 901,450
  GND-SIG1 w20: U3.55 U3.57
  Bottom Layer w8: 998,-249 1552,-249 1757,-44 1757,184
+ADC_VREF: C4.2 C7.2 POT1.3 POT2.3 POT3.3 U3.1 U4.8 U5.8 | length 3753.7
  Top Layer w8: -1094.68,400 -1094.17,400.51
  GND-SIG1 w8: -934,429 -913,450 U3.1
  Bottom Layer w8: -2229.72,98.43 -2072.57,98.43 ; -1704.72,-651.57 -1704.72,-502.28 -2072.57,-134.43 -2072.57,98.43 ; -1679.72,848.43 -1672.5,841.2 -1641.2,841.2 -1556,756 -1556,275 -1557,274 ; U3.1 -711,450 -933,228 -1152,228 -1198,274 -1557,274 ; -2072.57,98.43 -1732.57,98.43 -1557,274
+VBATT: J7.1 U3.56
+VBATT_BU: J7.3 U3.53 | length 2088.8
  Bottom Layer w8: U3.53 731,250 1719,1238 1719,1502 1817,1600 1950,1600
+VUSB_RAW: J4.A4B9 J4.B4A9 L1.1 | length 30.7
  Top Layer w10: L1.1 2559.45,232.05 L1.1@2579.06,212.44
FC0_CLK: J8.5 U3.5 | length 1239.9
  Top Layer w8: -761,1332 -761,298 -713,250 U3.5
FC0_RXD: J4.4 J6.4 J8.7 U3.3 | length 3724.8
  Top Layer w8: J6.4 63,1823 v1(185,1823)
  Bottom Layer w8: -1150,2200 -1085,2135 -56,2135 J4.4 185,1894 v1(185,1823) 185,1320 -40,1095 -260,1095 -354,1001 -354,661 -303,610 -303,524 -477,350 U3.3
FC0_SSEL0: J8.1 U3.6 | length 1140.6
  Top Layer w8: -781,1261 -781,245 -736,200 U3.6
FC0_SSEL1: J8.3 U3.7 | length 1222.6
  Top Layer w8: -799,1182 -799,207 -742,150 U3.7
FC0_TXD: J4.5 J6.3 J8.9 U3.4 | length 3323
  Top Layer w8: U3.4 -566,300 -507,359 -507,1599 ; J6.3 -25,1779 -72,1826 -133.49,1826 -170,1862.51 -170,1926 -136,1960 89,1960 J4.5
  Bottom Layer w8: -1050,2200 -21,2200 J4.5
FC1_CLK: J9.5 U3.8 | length 2112.6
  Top Layer w8: v1(-1687,1496) -1544,1353 -1544,1297 -819,572 -819,188 -731,100 U3.8
  Bottom Layer w8: -1950,1500 -1948,1498 -1689,1498 v1(-1687,1496)
FC1_RXD: J9.7 U3.10 | length 2244.7
  Top Layer w8: -1950,1600 -1948,1598 -1812,1598 -1774,1560 -1774,1412.97 -856,494.97 -856,118 -738,0 U3.10
FC1_SSEL0: J9.1 U3.9 | length 2109.5
  Top Layer w8: v1(-1603,1296) -838,531 -838,161 -727,50 U3.9
  Bottom Layer w8: -1950,1300 -1946,1296 v1(-1603,1296)
FC1_SSEL1: J9.3 U3.12 | length 2149.4
  Top Layer w8: -1950,1400 -1903,1400 -1506,1003 -1443,1003 -893,453 -893,21 -772,-100 U3.12
FC1_TXD: J9.9 U3.11 | length 2444.3
  Top Layer w8: v1(-1863,1536) -1863,1465 -873,475 -873,64 -759,-50 U3.11
  Bottom Layer w8: -1950,1700 -1939.28,1689.28 -1910.28,1689.28 -1863,1642 v1(-1863,1536)
FC2_CLK: J10.7 U3.62 | length 2080.6
  Bottom Layer w8: U3.62 250,800 1350,1900 1350,2200
FC2_SDA: J10.9 U3.59 | length 541.2
  Top Layer w8: U3.59 400,786 654,1040 725,1040
FC2_SSEL0: J10.1 U3.58 | length 1147.5
  Top Layer w8: v1(1001,1425) 1050,1474
  Bottom Layer w8: U3.58 450,784 1001,1335 v1(1001,1425)
FC2_SSEL1: J10.3 U3.60 | length 2770.7
  Bottom Layer w8: U3.60 350,824.91 1544,2018.91 1544,2302 1470,2376 1238,2376 1196,2334 1196,2246 1150,2200
FC2_WS: J10.5 U3.61 | length 1379
  Top Layer w8: U3.61 300,737 640,1077 703.91,1077 1250,1623.09
FC3_CLK: J11.7 U3.72 | length 1171.4
  Top Layer w8: J11.7@-500,2550 -452,2598 -365,2598 -349,2582 -349,2400 -370,2379 ; -400,1274 -350,1224 -350,639 -335,624 -299,624 U3.72
FC3_SDA: J11.9 U3.70 | length 870.4
  Top Layer w8: -344,1334 -280,1270 -280,791 -234,745 -181,745 -150,714 U3.70
FC3_SSEL0: J11.1 U3.68 | length 2298.4
  Top Layer w8: -700,2550 -767,2617 -767,2687 -718,2736 -226,2736 -191,2701 -191,2271 -293,2169 ; -293,1423 -50,1180 U3.68
FC3_SSEL1: J11.3 U3.69 | length 1751.8
  Top Layer w8: -600,2550 -551,2599 -551,2679 -521,2709 -271,2709 -230,2668 -230,2328 -316,2242 ; -316,1376 -100,1160 U3.69
FC3_WS: J11.5 U3.71 | length 730.7
  Top Layer w8: -370,1306 -320,1256 -320,782.03 -258.97,721 -209,721 -200,712 U3.71
FC4_CLK: J12.7 U3.64 | length 713.9
  Top Layer w8: U3.64 197,622 220,622 247.96,649.96 247.96,729.96 600,1082 ; J12.7@495,2545 J12.7@500,2550
FC4_SDA: J12.9 U3.65 | length 2123.5
  Bottom Layer w8: U3.65 100,787 300,987 300,1812 700,2212 700,2550
FC4_SSEL0: J12.1 U3.66 | length 1038.1
  Bottom Layer w8: U3.66@50.91,575 U3.66 93,618 128,618 149,639 149,786 380,1017 v1(380,1455)
FC4_SSEL1: J12.3 U3.63 | length 901.1
  Top Layer w8: U3.63 200,727 550,1077 ; J12.3@300,2550 300,2309 380,2229
FC4_WS: J12.5 U3.67 | length 1204.3
  Top Layer w8: U3.67 0,1040 95,1135 200.81,1135 495,1429.19 ; J12.5@400,2550 400,2560 440,2600 534.14,2600 550,2584.14
FC5_CLK: J3.9 J13.3 U3.47 | length 1083
  Top Layer w8: U3.47 U3.47@580.37,-55.37 ; 1818,-1315 1903,-1400 1950,-1400 ; 1950,-1500 1998.58,-1451.42 2112.58,-1451.42 2173,-1391 2173,-751
FC5_RXD: J3.8 J13.5 U3.42 | length 2079.4
  Bottom Layer w8: U3.42 752,-377 1156,-377 1887,-1108 1887,-1562 1915.22,-1590.22 1940.22,-1590.22 1950,-1600
FC5_SSEL0: J3.12 J13.1 U3.44 | length 157.6
  Top Layer w8: U3.44 675,-158 691,-142 711.54,-142 762.79,-90.76
FC5_TXD: J13.7 U3.46 | length 112.2
  Bottom Layer w8: U3.46 684,-100 v1(757,-27)
FS0B_CLK: J14.9 R18.1 U3.20 | length 458.1
  Top Layer w8: -862.52,-465 -691,-465 -659,-497 -528,-497 U3.20
FS0B_CS: J14.11 J15.7 R17.1 U3.28 | length 6074.5
  Top Layer w8: R17.1 v1(-1252.49,-762.51) ; -816,-400 -759,-400 -713,-354 -640,-354 -597,-397 -289,-397 -263,-371 -237,-371 v1(-236.24,-370.24) ; U3.28 -44.51,-569.51 -44.51,-544.51 -18,-518 173,-518 203.53,-548.53 203.53,-607.53 250,-654 250,-723 301,-774 301,-1192 425,-1316 425,-1582 659,-1816 659,-2191 650,-2200
  Bottom Layer w8: -2050,-1300 -2146,-1396 -2146,-1701 -2064,-1783 -1219,-1783 -816,-1380 -816,-400 ; v1(-236.24,-370.24) -235.47,-371 -204,-371 -50,-525 U3.28
FS0B_DATA0: J14.1 R19.1 U3.13 | length 2897.5
  Top Layer w8: R19.1 -1296.52,-500.47 R19.1@-1284.48,-512.51 ; -847.99,-150 U3.13
  Bottom Layer w8: -1950,-1700 -1336,-1700 -890,-1254 -890,-303 -820,-233 -736,-233 -717,-252 -652,-252 -613,-213 -613,-188 U3.13
FS0B_DATA1: J14.3 R20.1 U3.14 | length 2421.8
  Top Layer w8: -862.52,-200 U3.14
  Bottom Layer w8: -1950,-1600 -1325,-1600 -920,-1195 -920,-299.53 -820.24,-199.76
  other v1: -1256.49,-562.51
FS0B_DATA2: J14.5 R21.1 U3.15 | length 1660.3
  Top Layer w8: R21.1 v1(-1256.49,-632.51) -1252.28,-628.31 -1234.28,-628.31 ; -782,-250 U3.15
  Bottom Layer w8: v1(-1083,-1546) -851.49,-1314.49 -851.49,-298.23 -823.26,-270 -820,-270
FS0B_DATA3: J14.7 R22.1 U3.16 | length 477.6
  Top Layer w8: -862.52,-335 -761,-335 -730,-304 -679,-304 U3.16
  Bottom Layer w8: v1(-773,-535) -773,-398 U3.16
GND: C1.1 C2.1 C3.1 C4.1 C5.1 C6.1 C7.1 H1.1 H2.1 H3.1 H4.1 J2.6 J2.CDA J2.M J3.2 J3.5 J3.13 J4.1 J4.A1B12 J4.B1A12 J4.M1 J4.M2 J4.M3 J4.M4 J6.5 J7.2 J7.4 J7.6 J7.8 J7.10 J7.12 J8.2 J8.4 J8.6 J8.8 J8.10 J8.12 J9.2 J9.4 J9.6 J9.8 J9.10 J9.12 J10.2 J10.4 J10.6 J10.8 J10.10 J10.12 J11.2 J11.4 J11.6 J11.8 J11.10 J11.12 J12.2 J12.4 J12.6 J12.8 J12.10 J12.12 J13.2 J13.4 J13.6 J13.8 J13.10 J13.12 J14.2 J14.4 J14.6 J14.8 J14.10 J14.12 J15.2 J15.4 J15.6 J15.8 J15.10 J15.12 J16.2 J16.4 J16.6 J16.8 J16.10 J16.12 POT1.1 POT1.4 POT2.1 POT2.4 POT3.1 POT3.4 R2.1 R4.1 R5.1 R9.1 R11.1 R13.1 SW1.A SW2.2 SW2.4 SW3.2 SW3.4 SW4.2 SW4.4 U2.1 U3.54 U3.M U4.4 U5.4 U6.4 | length 1951.2
  Top Layer w8: -2751,-328 -2749.47,-328 ; v1@-2747.47,-300 -2724.95,-277.48 -2722,-277.48 R13.1 -2690.03,-270.51 C3.1 ; v1@-2706,176 -2706,206.52 R9.1 ; v1(-2635,176) C1.1 ; v1(-2425.51,350) C7.1 ; C4.1 v1(-2380.51,-15) ; v1(-1778.49,-956.51) -1778.49,-914.51 C5.1 ; -1540,345 -1539,344 ; U6.4 -1439.49,-612.51 v1(-1436.49,-615.51) ; SW2.4 -375,-1715 v1(-372,-1718) ; v1(-322,-2446) -319,-2446 -317.29,-2444.29 J2.M@-273.03,-2444.29 ; v1(-311,-2688) -310.61,-2688.39 J2.CDA ; v1(-276,-2933) -273.03,-2930.03 J2.M@-273.03,-2851.77 ; v1(-276,-1717) -276,-1715 -275,-1714 SW2.2 ; v1(-240,986) -232,994 SW1.A@-170,994 ; v1(-113,-2232) -113,-2273.61 J2.6 ; v1(-52,-1722) -50,-1720 SW3.4 ; J6.5 -1,1711 -1,1637 v1(-2,1636) ; v1(46,-1718) 50,-1714 SW3.2 ; J2.M@165.94,-2275 165.94,-2271.06 v1(208,-2229) ; SW1.A@170,994 182,982 239.49,982 243,985.51 v1(243,991) ; v1(254,-2932) 253,-2931 253,-2874.95 J2.M@258.46,-2869.49 ; SW4.4 275,-1715 276,-1716 v1(276,-1717) ; v1(374,-1719) 375,-1718 SW4.2 ; v1(768,-186) 769,-186 v1@769.76,-185.24 ; v1(770,-153) 771,-154 780.97,-154 v1@781.22,-153.75 ; v1(774,-311) v1@776,-309 ; v1(777,35) v1@777.23,35.23 ; v1(2517,-42.63) 2549.17,-42.63 U2.1
  Top Layer w10: v1(2521.52,111) 2522.52,110 R4.1 ; v1(2522,-121) 2524,-123 R5.1
  Bottom Layer w6: 1779.04,178 1824.54,132.5 1972.5,132.5 1993,153 1993,198 ; 1888,203 1913,178 ; 1928,223 1953,248 2023,248 ; 1973,-57 1973,-47
  other v1: -2749,-300 1750,-50 1752,54 -2705,175
ISP0: J1.5 R16.1 SW4.1 SW4.3 U3.17 | length 2438.3
  Top Layer w8: v1(246,-1857) 275,-1886 SW4.3 SW4.1 381,-2006 381,-2080 388.52,-2087.52 R16.1
  Bottom Layer w8: U3.17 -304,-350 -103,-551 -103,-601 -51,-653 -51,-962 0,-1013 0,-1170 -11,-1170 -50,-1209 -50,-1534 246,-1830 v1(246,-1857)
ISP1: J1.7 R15.1 SW3.1 SW3.3 U3.18 | length 2570.9
  Top Layer w8: v1(-59,-1902) -58,-1903 56,-1903 v1(57,-1904) ; SW3.3 SW3.1 72,-2022 72,-2062.47 107.05,-2097.52 R15.1 112,-2095.52 v1(112,-2062)
  Bottom Layer w8: U3.18 -670,-395 -334,-395 -198,-531 -198,-601 -145,-654 -145,-728 -92,-781 -92,-1162 -150,-1220 -150,-1811 v1(-59,-1902) ; v1(57,-1904) 56,-1905 56,-2006 v1(112,-2062)
ISP2: J1.9 R14.1 SW2.1 SW2.3 U3.19 | length 2145.5
  Top Layer w8: SW2.3 SW2.1 ; R14.1 -212.95,-2092.52 -253,-2052.47 -253,-2022 SW2.1 ; v1(-202,-1015) -200,-1017 -200,-1170 -206.49,-1176.49 -252.49,-1176.49 -265,-1189 -265,-1368 -210,-1423 -210,-1910 -275,-1975 SW2.1
  Bottom Layer w8: U3.19 -378,-450 -303,-525 -303,-597 -257,-643 -257,-728 -202,-783 v1(-202,-1015)
LCD_DC: J3.7 U3.75 | length 1994.7
  Top Layer w8: U3.75 -459,675 -491,643 -491,426 234,-299 603,-299 648,-254 712,-254 729,-237 729,-153 759.75,-122.25
LCD_RESET: J3.6 U3.76 | length 1431.9
  Top Layer w8: U3.76 -191,316 27,316 244,99 600,99 654,45 704,45 745.27,3.73
MCLK: U3.48 | length 2464.5
  Top Layer w8: v1(448,-219) 448,-74.61 522.61,0 U3.48 ; v1(1849,-1298) 1948,-1298 1950,-1300
  Bottom Layer w8: v1(448,-219) 450,-219 477,-246 477,-438 541,-502 1053,-502 v1(1849,-1298)
NetC1_2: C1.2 R8.2 R9.2 U4.3 | length 160.5
  Top Layer w8: R8.2 C1.2@-2645.51,270 ; C1.2 -2596.51,270.51
NetC2_2: C2.2 R10.2 R11.2 U4.5 | length 152
  Top Layer w8: -2769.28,-31.76 -2648.24,-31.76 -2641.76,-38.24 -2641.76,-39.23 -2627.04,-53.94
NetC3_2: C3.2 R12.2 R13.2 U5.5 | length 848.6
  Top Layer w8: R12.2 -2748.52,-215 -2699.48,-215 R13.2 -2639.03,-212.52 C3.2 ; C3.2@-2650.72,-193.79 -2637.48,-207.02 C3.2@-2637.48,-207.52
  Bottom Layer w8: -1663,-300 -1663,-181 -1302,180 -1224,180
NetJ3_3: J3.3 R2.2
NetJ4_A5: J4.A5 R5.2 | length 3
  Top Layer w8: R5.2 R5.2@2612.48,-120.05
NetJ4_B5: J4.B5 R4.2 | length 3
  Top Layer w8: R4.2@2615,107.05 R4.2
NetJ8_11: J8.11 R3.1
NetJ9_11: J9.11 R23.1
NetJ10_11: J10.11 R24.1
NetJ11_11: J11.11 R25.1 | length 229.6
  Top Layer w8: -344,2330 -300,2374 J11.11@-300,2541.36
NetJ12_11: J12.11 R26.1
NetJ13_11: J13.11 R27.1
NetPOT1_2: POT1.2 R8.1 | length 0
NetPOT2_2: POT2.2 R10.1
NetPOT3_2: POT3.2 R12.1
NetR3_2: R3.2
NetR17_2: R17.2 U6.1 | length 126.9
  Top Layer w8: U6.1 R17.2
NetR18_2: R18.2 U6.6 | length 486.5
  Top Layer w8: U6.6 -1682.49,-662.51 -1517.49,-827.51 R18.2
NetR19_2: R19.2 U6.5 | length 468.3
  Top Layer w8: U6.5 -1665.49,-612.51 -1550.49,-497.51 R19.2
NetR20_2: R20.2 U6.2 | length 428.3
  Top Layer w8: U6.2 -1552.49,-712.51 -1585,-680 -1585,-593.03 -1554.49,-562.51 R20.2
NetR21_2: R21.2 U6.3 | length 139.3
  Top Layer w8: U6.3 -1428.84,-662.51 -1398.84,-632.51 R21.2
NetR22_2: R22.2 U6.7 | length 426.9
  Top Layer w8: U6.7 -1774.15,-704.51 v1(-1733.49,-704.51) ; v1(-1405.49,-694.51) -1402.49,-697.51 R22.2
  Bottom Layer w8: -1297,-342 -1287,-332 -969,-332
NetR23_2: R23.2
NetR24_2: R24.2
NetR25_2: R25.2
NetR26_2: R26.2
NetR27_2: R27.2
PDM_CLK_01: J16.3 U3.22 | length 1770.9
  Bottom Layer w8: -650,-2200 -650,-1692 -467,-1509 -467,-655 -437,-625 -400,-625 U3.22
PDM_CLK_23: J16.7 U3.24 | length 932.4
  Top Layer w8: -850,-1236 -344,-730 -344,-630 -289,-575 U3.24
PDM_CLK_45: J15.3 U3.26 | length 2516
  Top Layer w8: U3.26 -150,-520 -82,-452 312,-452 398,-538 398,-603 466,-671 466,-1183 549,-1266 549,-1517 850,-1818 850,-2200
PDM_DAT_01: J16.1 U3.21 | length 1587.1
  Bottom Layer w8: -550,-2200 -550,-1700 -400,-1550 U3.21
PDM_DAT_23: J16.5 U3.23 | length 782.4
  Top Layer w8: -750,-1271 -300,-821 U3.23
PDM_DAT_45: J15.1 U3.25 | length 2795.8
  Top Layer w8: U3.25 -200,-518 -98,-416 374,-416 499,-541 499,-734 950,-1185 950,-2200
PDM_DAT_67: J15.5 U3.27 | length 2433.8
  Top Layer w8: U3.27 -100,-528 -53,-481 234.97,-481 302.93,-548.96 302.93,-613.93 347,-658 347,-1160 483,-1296 483,-1569.92 750,-1836.92 750,-2200
PIO2_10: J15.9 U3.35 | length 1628.6
  Bottom Layer w8: U3.35 300,-793 550,-1043 550,-2200
PMIC_ON: J7.5 U3.52 | length 1923.6
  Bottom Layer w8: U3.52 747,200 1795,1248 1795,1436 1859,1500 1950,1500
POT1: U3.2 U4.1 U4.2 | length 698.5
  Bottom Layer w8: -1241,80 -995,80 U3.2
POT2: U3.73 U4.6 U4.7 | length 1437.9
  Bottom Layer w8: -1159,24 -939.5,24 -812.5,151 -641,151 -586,206 -407,206 -199,414 -199,597 -221,619 -244,619 U3.73
POT3: U3.74 U5.6 U5.7 | length 768.2
  Bottom Layer w8: -986,273 -758,501 -424,501 U3.74 U3.74@-355,580
POT_SW1: POT1.5 U3.37 | length 2177
  Bottom Layer w8: -1322,-207 -1320,-209 -1017,-209 -960,-152 -653,-152 -602,-101 119,-101 400,-382 U3.37
  other v1: -1758.49,-569.51
POT_SW2: POT2.5 U3.38 | length 2913.7
  Bottom Layer w8: -1912,-208 -1786,-334 -1548,-334 -1267,-53 -647,-53 -599,-5 97,-5 450,-358 U3.38
POT_SW3: POT3.5 U3.39 | length 2592.6
  Bottom Layer w8: -1537,-257 -1507,-257 -1286,-36 -889,-36 -803,50 -643,50 -595,98 209,98 507,-200 507,-382 U3.39
RST: SW1.B U3.49 | length 1601.2
  Top Layer w8: v1(-230,810) -176,810 SW1.B@-170,816 ; v1(67,809) SW1.B@159.5,809 ; v1(127,378) 96,409 96,582 153,639 153,802.5 SW1.B@159.5,809 ; SW1.B@170,816 166.5,816 SW1.B@159.5,809
  Bottom Layer w8: v1(-230,810) -229,809 v1(67,809) ; v1(127,378) 127,239 309,57 568,57 U3.49
SD_CD: J2.CDB R1.1 U3.36 | length 2927.9
  Top Layer w8: R1.1 -352.52,-2275 J2.CDB -235.63,-2233.63 -235,-2233 v1(-235,-2230)
  Bottom Layer w8: v1(-235,-2230) -106,-2359 578,-2359 599,-2338 599,-1040 350,-791 U3.36
SD_CLK: J2.5 U3.34 | length 2342.3
  Top Layer w8: J2.5@-68,-2274.69 v1(-68,-2168)
  Bottom Layer w8: v1(-68,-2168) 19,-2255 341,-2255 429,-2167 429,-979 250,-800 U3.34
SD_CMD: J2.3 U3.29 | length 1884.7
  Top Layer w8: J2.3 20,-2273.31 v1(20,-2192)
  Bottom Layer w8: U3.29 0,-953 51,-1004 51,-1572 280,-1801 280,-2035 192,-2123 89,-2123 v1(20,-2192)
SD_D0: J2.7 U3.30 | length 1787
  Top Layer w8: J2.7 -147,-2267.08 -147,-1620 52.61,-1420.39 v1(52.61,-864)
  Bottom Layer w8: U3.30 51.3,-576.3 51.3,-862.7 v1(52.61,-864)
SD_D1: J2.8 U3.31 | length 1723.5
  Top Layer w8: J2.8 -198.23,-2213.23 -171,-2186 -171,-1596 -51,-1476 -51,-826 U3.31
SD_D2: J2.1 U3.32 | length 1718.7
  Top Layer w8: J2.1 104.92,-2265.16 150,-2220.08 U3.32
SD_D3: J2.2 U3.33 | length 1971.6
  Top Layer w8: J2.2 61.61,-2147.61 22.1,-2108.1 -59.9,-2108.1 -119,-2049 -119,-1855 -67.5,-1803.5 42.5,-1803.5 114,-1732 114,-1532 v1(116,-1530)
  Bottom Layer w8: v1(116,-1530) 263,-1383 263,-1105 200,-1042 U3.33
SYS_SCL: J1.1 R7.2 U3.41 | length 1845.9
  Top Layer w8: R7.2 200,-862.48 200,-1170
  GND-SIG1 w8: 200,-1170 200,-904 v1@244,-860 ; v1(252.18,-851.82) v1@244,-860 ; U3.41 739,-350 818,-429 818,-715 673,-860 v1@244,-860
SYS_SDA: J1.3 R6.2 U3.40 | length 3041.7
  Top Layer w8: R6.2 100,-862 100,-1170 ; v1(203.76,-339.76) 404.76,-339.76 465,-400 U3.40
  GND-SIG1 w8: 100,-1170 100,-938 225,-813 654,-813 762,-705 762,-436 726,-400 U3.40
  Bottom Layer w8: 100,-1170 100,-994 144,-950 144,-653 203.76,-593.24 v1(203.76,-339.76)
TEMP_SENSE: J7.11 U3.51 | length 2513.9
  Bottom Layer w8: U3.51 1058,150 2131,1223 2131,1624 2055,1700 2050,1700
USB_N: J4.A7 J4.B7 U2.2 U3.43 | length 1254
  Top Layer w11.26: v1(1751,-16) 1755.53,-16 1762.9,-8.63 ; U2.2@2614.82,-31.62 U2.2
  Bottom Layer w11.26: U3.43 575,-201.8 595.07,-181.73 618.27,-181.73 640.74,-159.26 712.98,-159.26 863.61,-8.63 1662.1,-8.63 1669.47,-16 1674,-16
USB_P: J4.A6 J4.B6 U2.3 U3.45 | length 1202.4
  Top Layer w11.26: v1(1751,18) 1755.53,18 1762.9,10.63 ; U2.3@2621,28.48 U2.3
  Bottom Layer w11.26: U3.45 585.48,-150 597.95,-162.47 610.29,-162.47 632.76,-140 705,-140 855.63,10.63 1662.1,10.63 1669.47,18 1674,18
pads on no net: F1.1 F2.1 F3.1 F4.1 J1.2 J1.4 J1.6 J1.8 J1.10 J1.11 J1.12 J1.13 J1.14 J1.M J1.M1 J3.1 J3.14 J3.22 J3.46 J4.2 J4.3 J4.6 J4.71 J4.A8 J4.ALIGN1 J4.B8 J6.1 J6.2 J6.6 J6.A J6.B J6.C J6.D J6.E J6.F J6.G J7.13 J7.14 J7.M J7.M1 J8.13 J8.14 J8.M J8.M1 J9.13 J9.14 J9.M J9.M1 J10.13 J10.14 J10.M J10.M1 J11.13 J11.14 J11.M J11.M1 J12.13 J12.14 J12.M J12.M1 J13.9 J13.13 J13.14 J13.M J13.M1 J14.13 J14.14 J14.M J14.M1 J15.13 J15.14 J15.M J15.M1 J16.9 J16.13 J16.14 J16.M J16.M1 POT1.MH1 POT1.MH2 POT2.MH1 POT2.MH2 POT3.MH1 POT3.MH2 U5.1 U5.2 U5.3
copper on no net: | length 2770.9